# Altium PCB MCU103A.PcbDoc (part 1 of 6)
Units mm, origin at the board's own origin, x right, y up, seen from the top; angles counter-clockwise.
Board outline 58.42 x 139.7 mm, 4 copper layers (Top Signal, GND, PWR, Bottom Signal), stack 1.565 mm thick; 256 components, 210 nets, 1058 pads, 772 vias.
Unrouted connection lines stored in the file: 237.
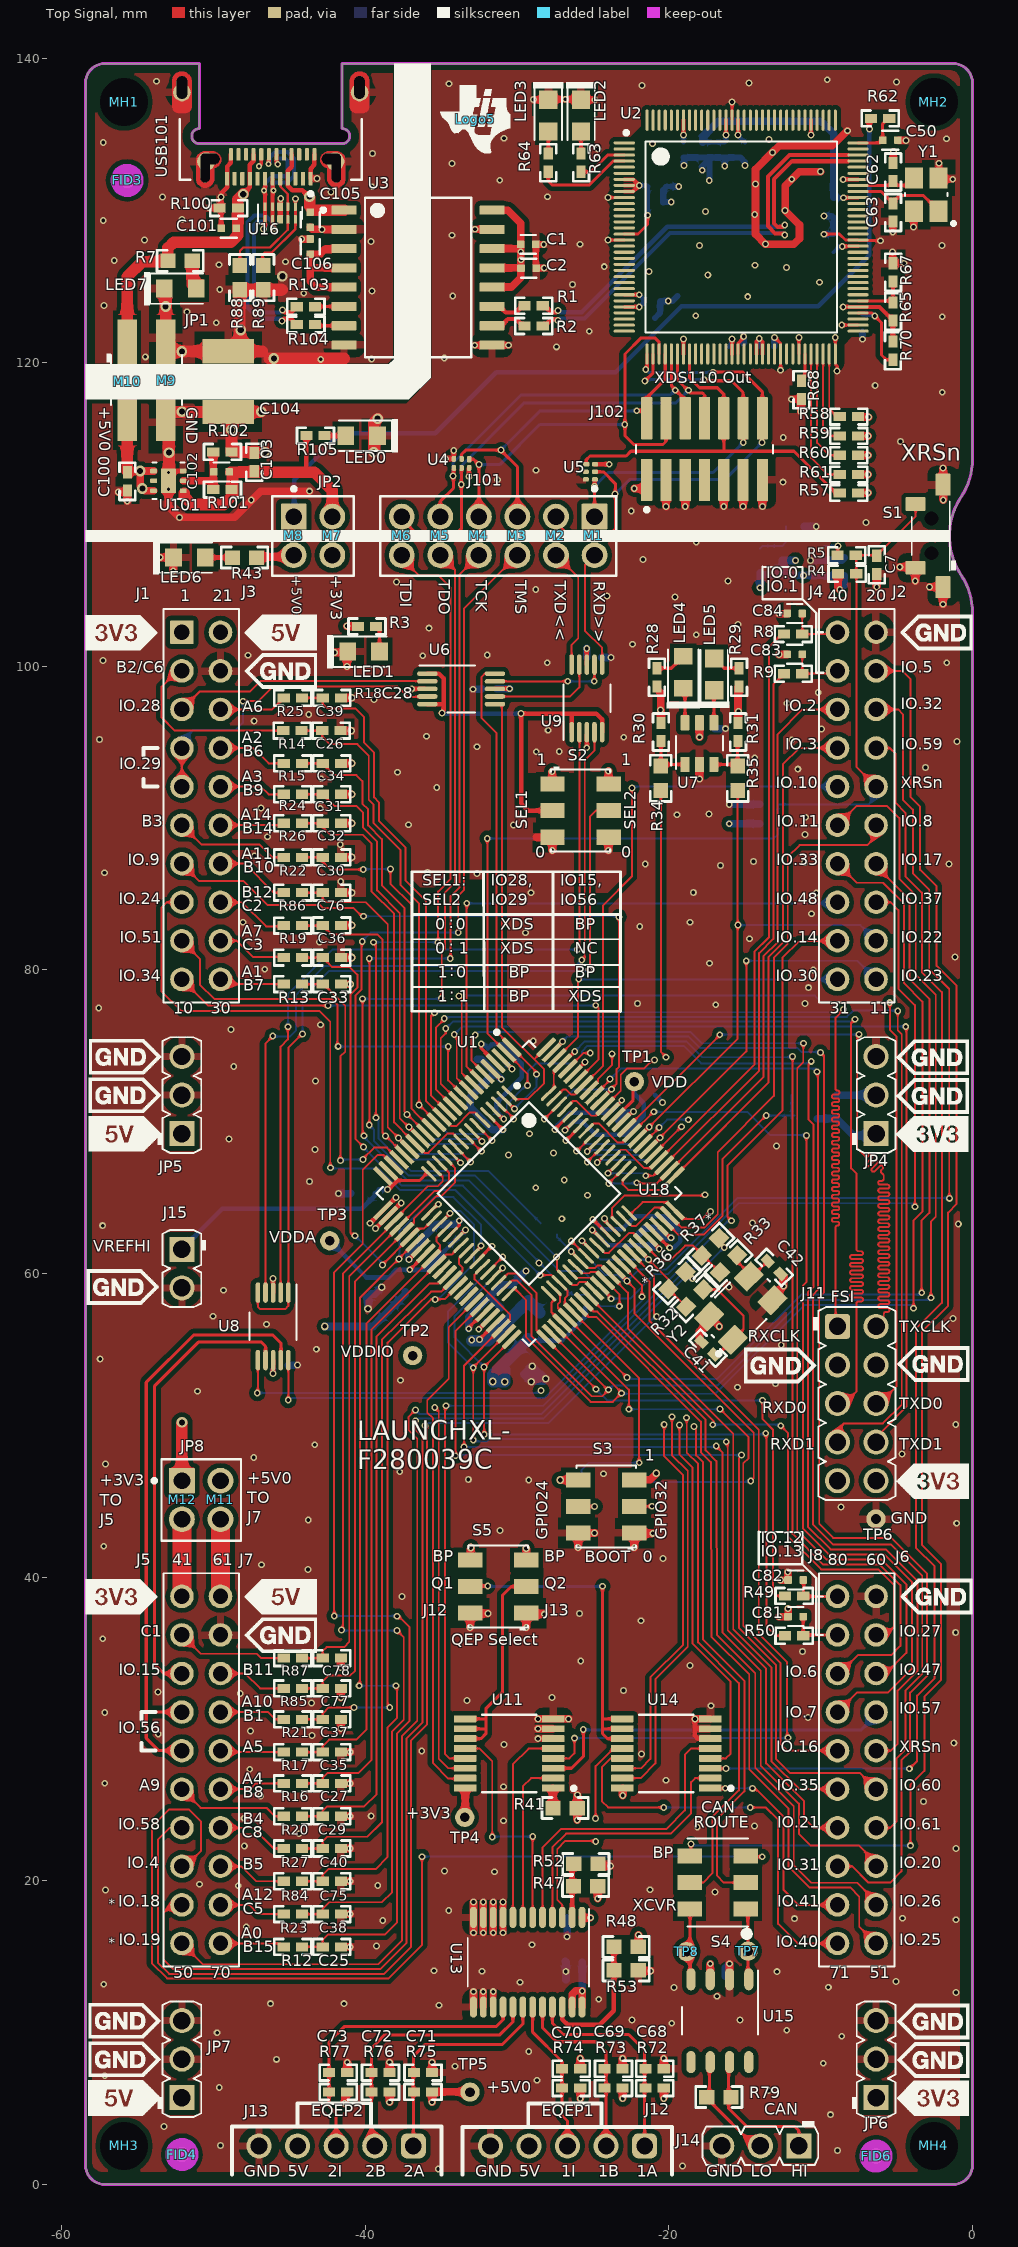
[diagram p0: Top Signal view]
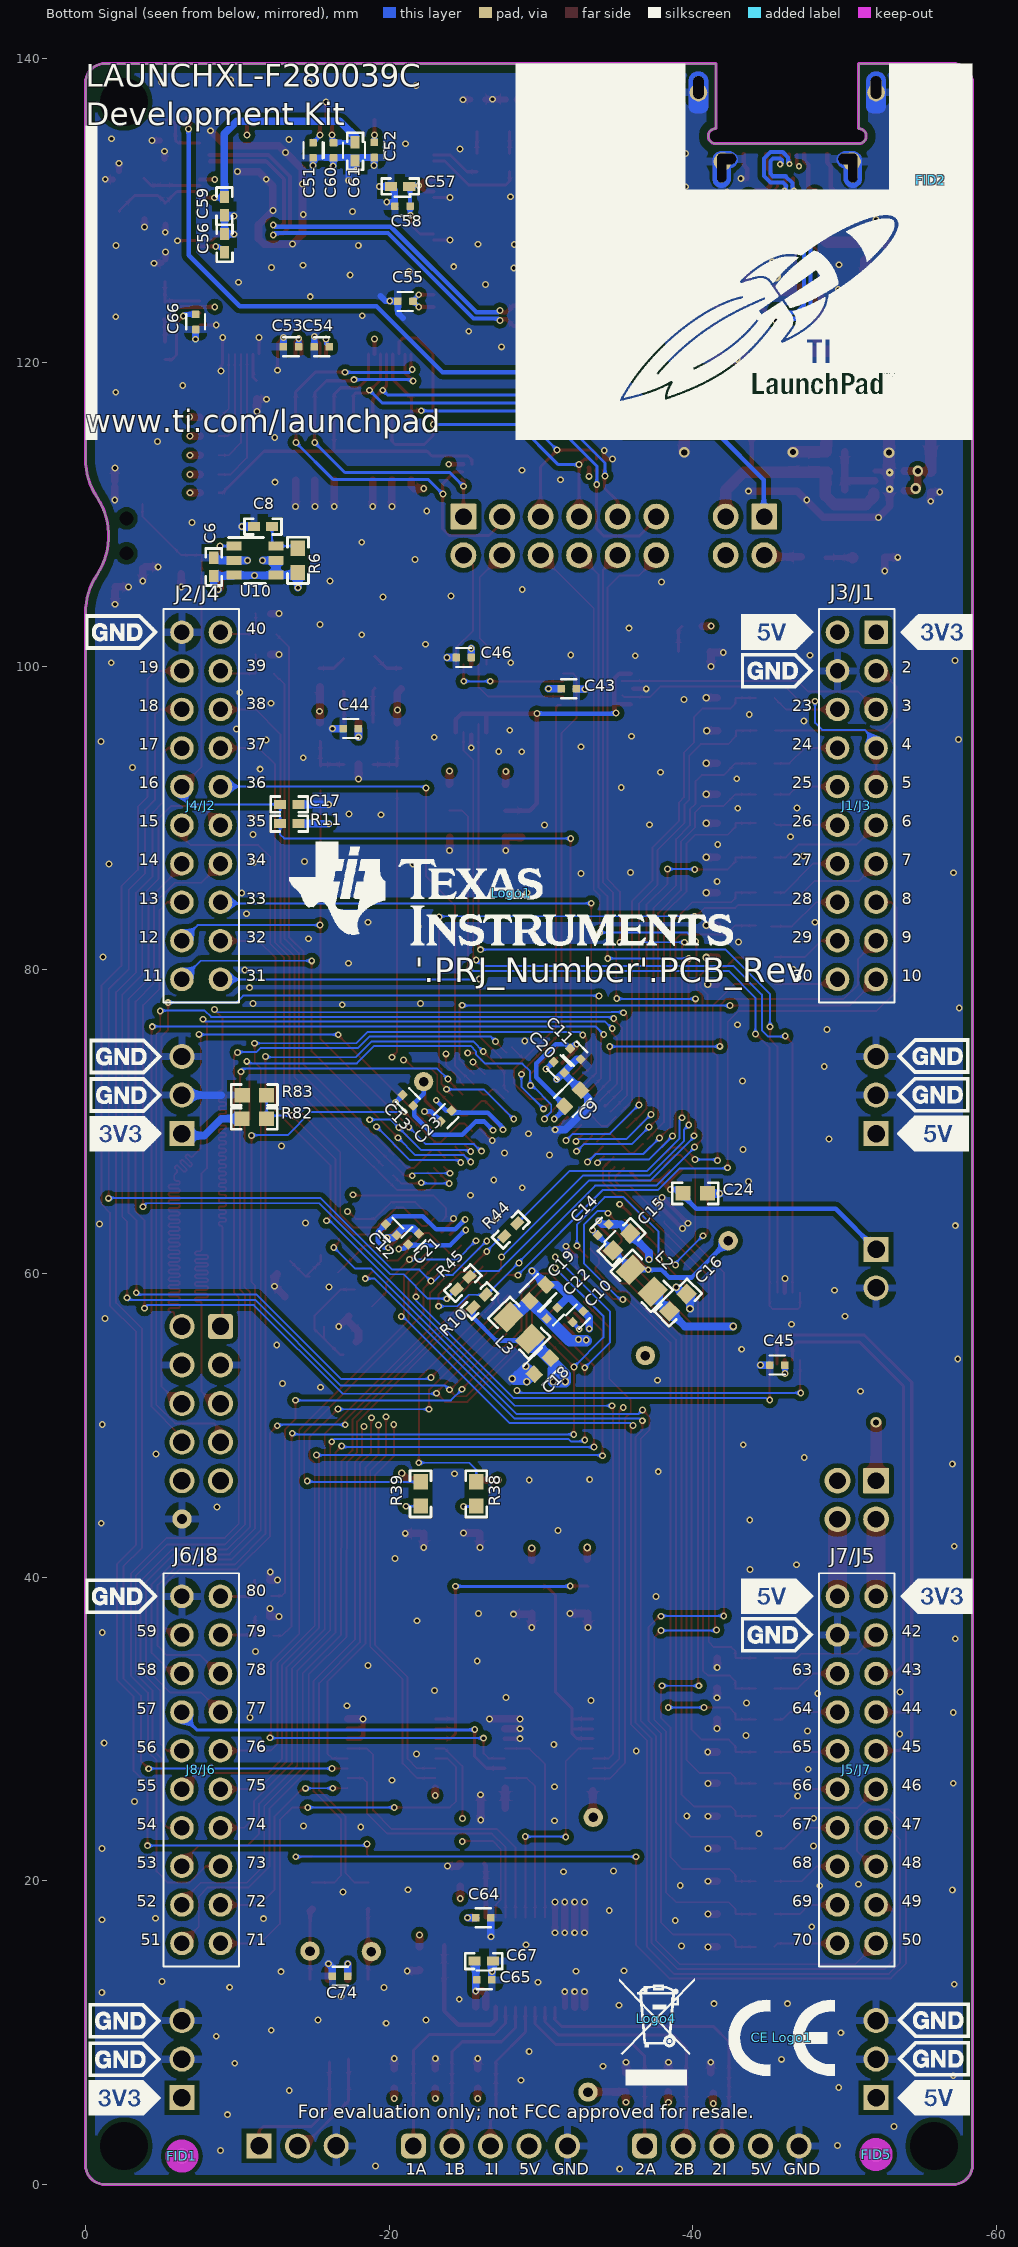
[diagram p1: Bottom Signal view, seen from below]
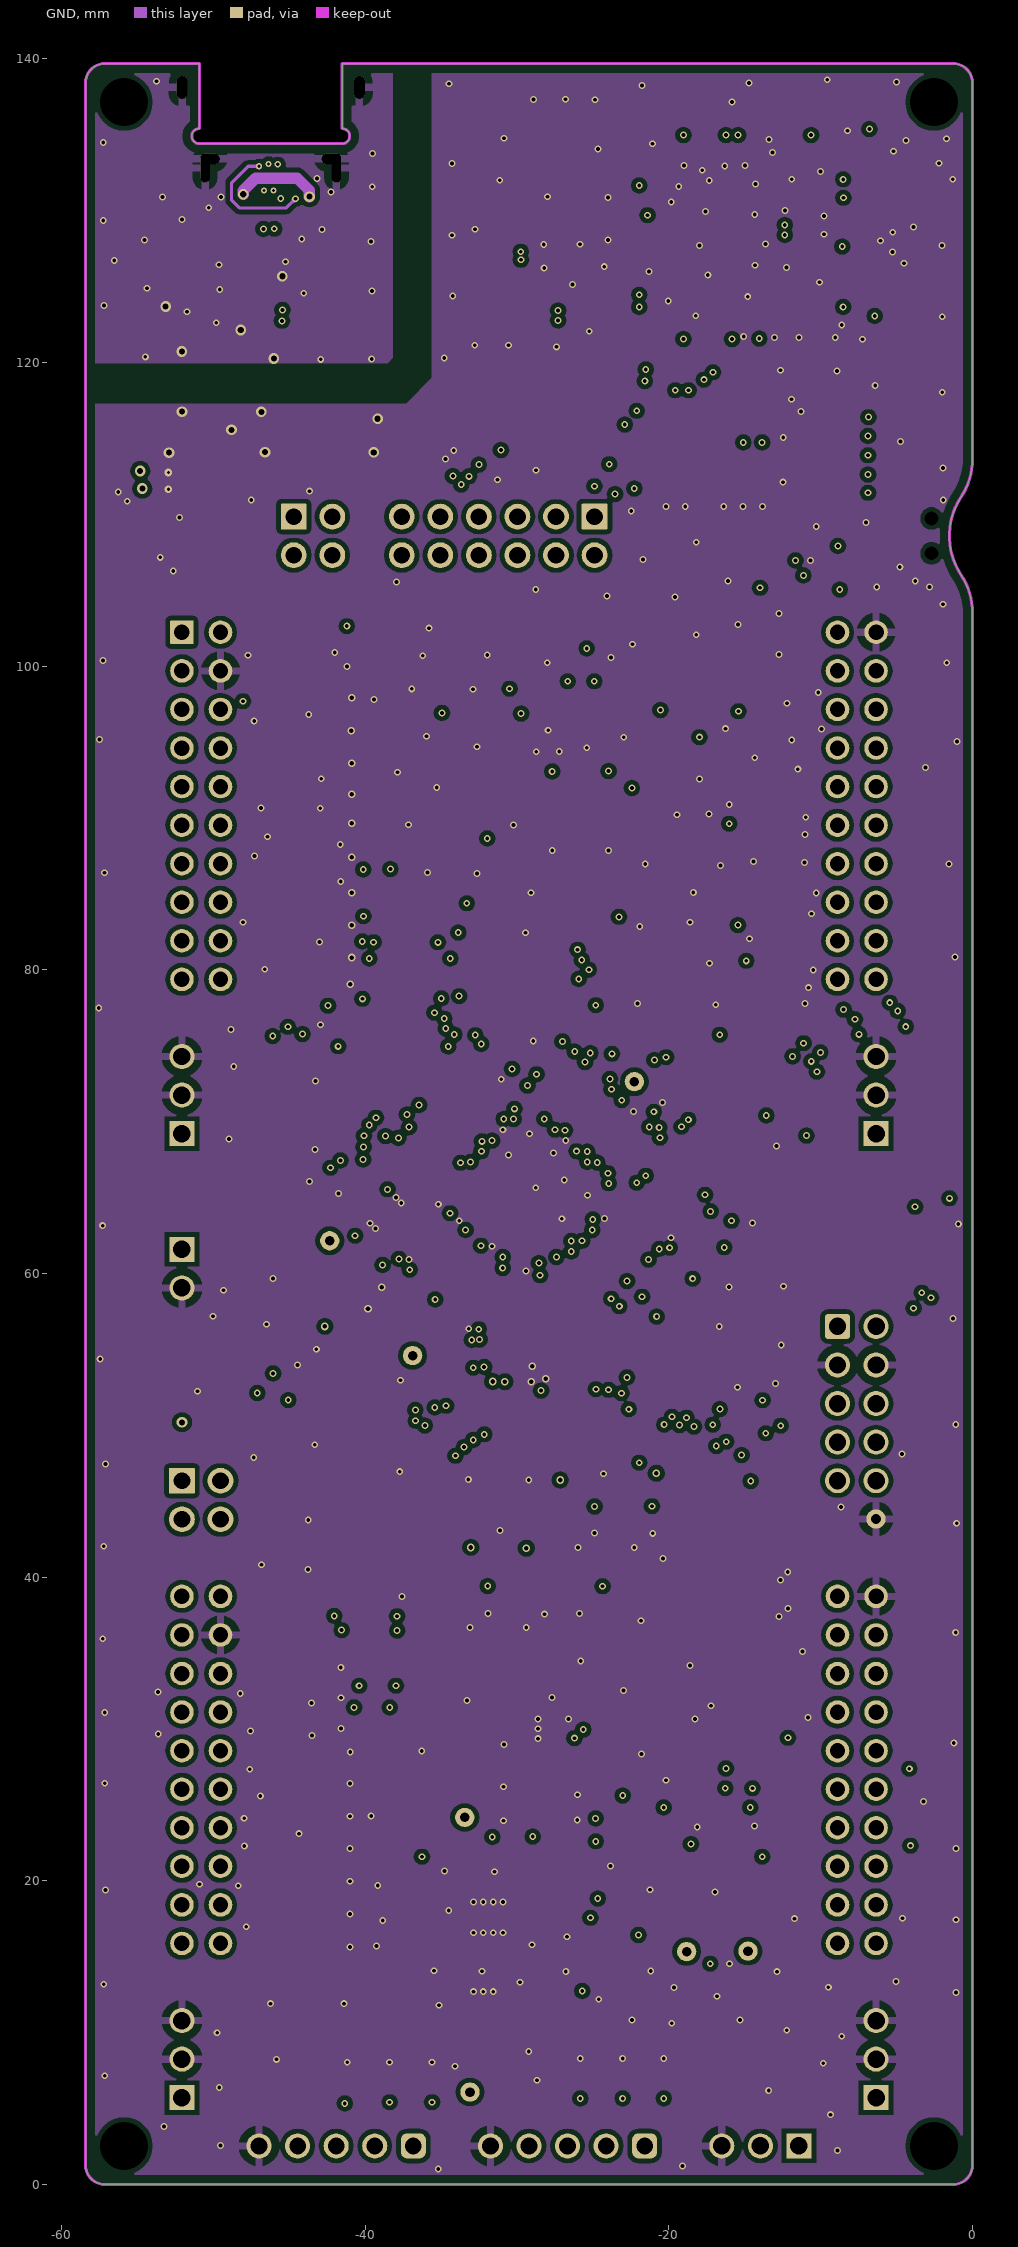
[diagram p2: GND]
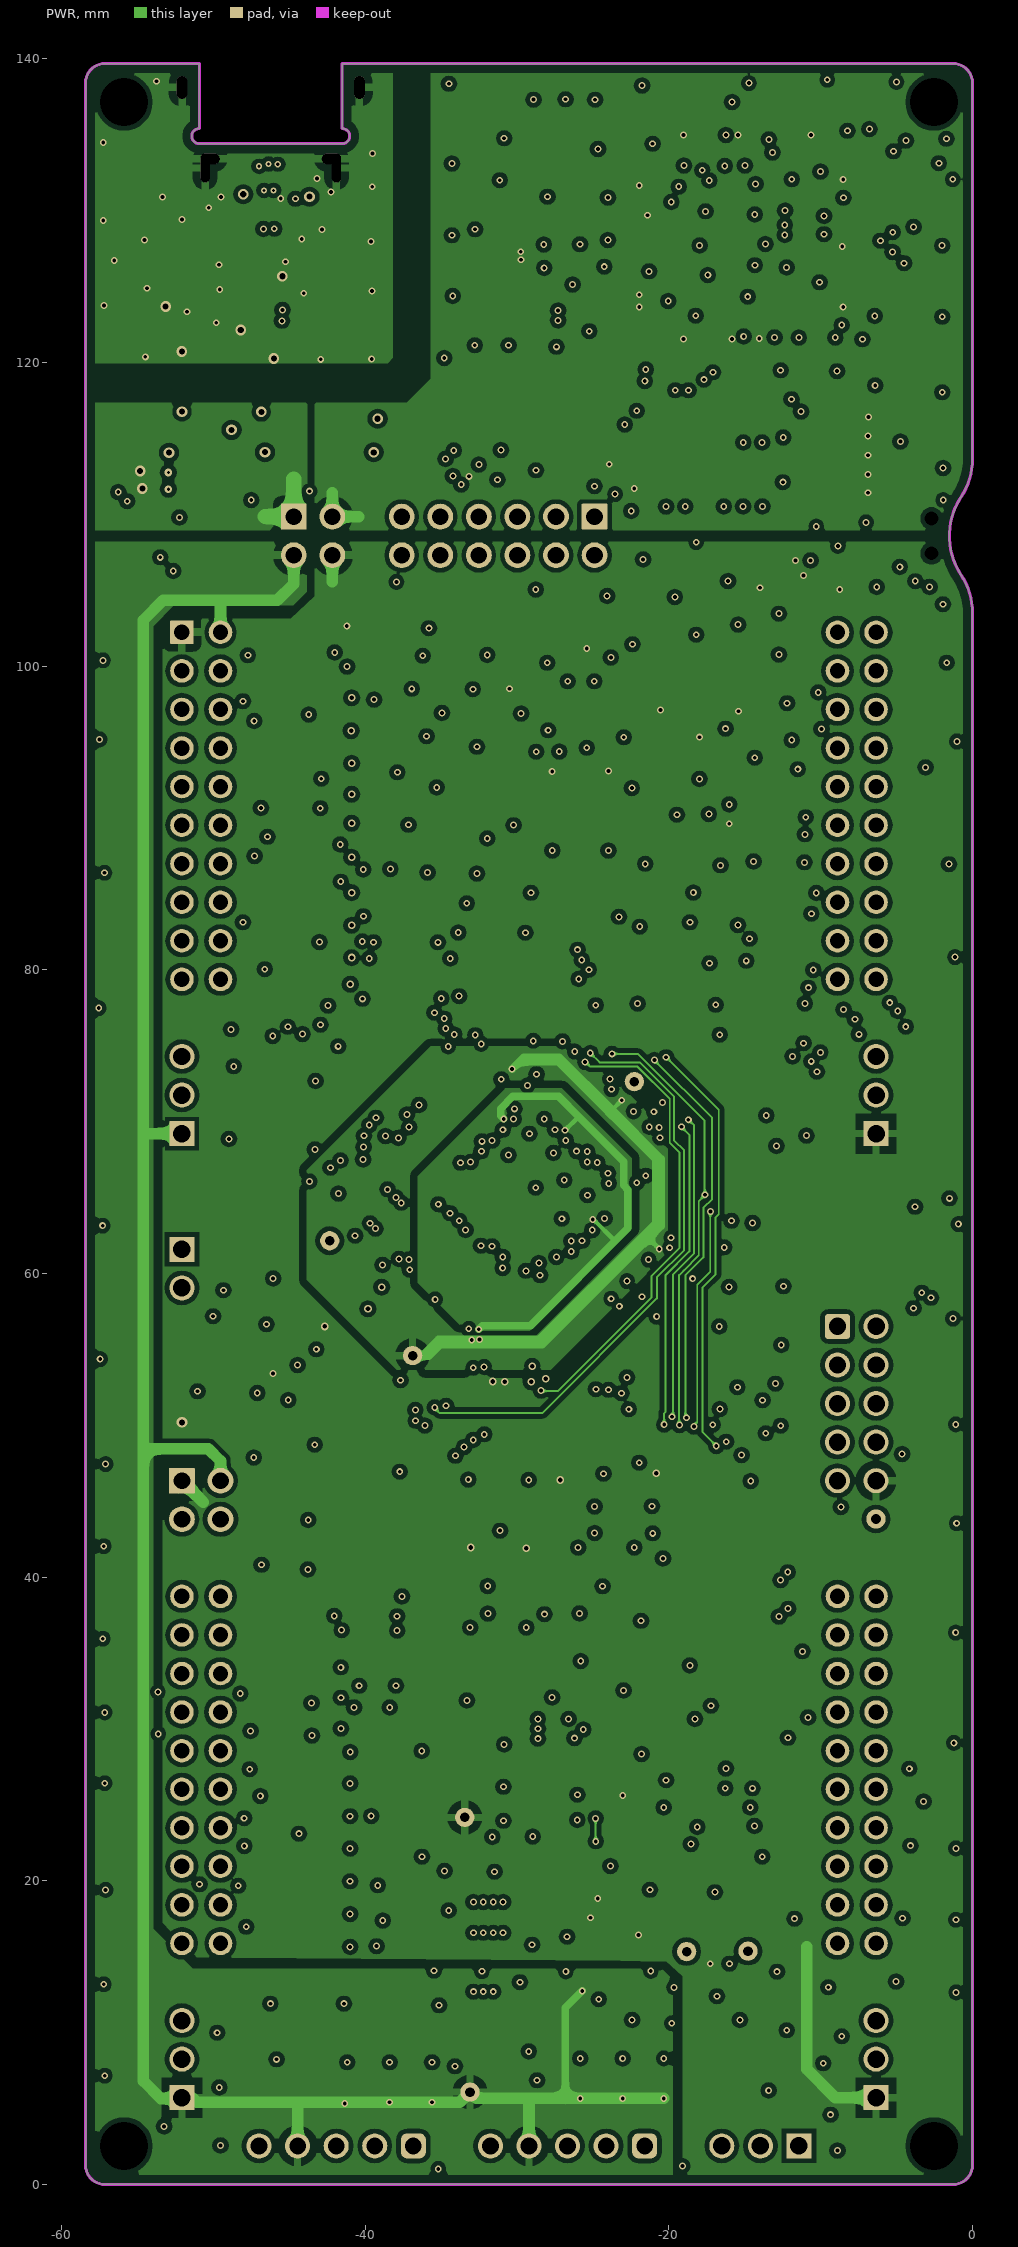
[diagram p3: PWR]
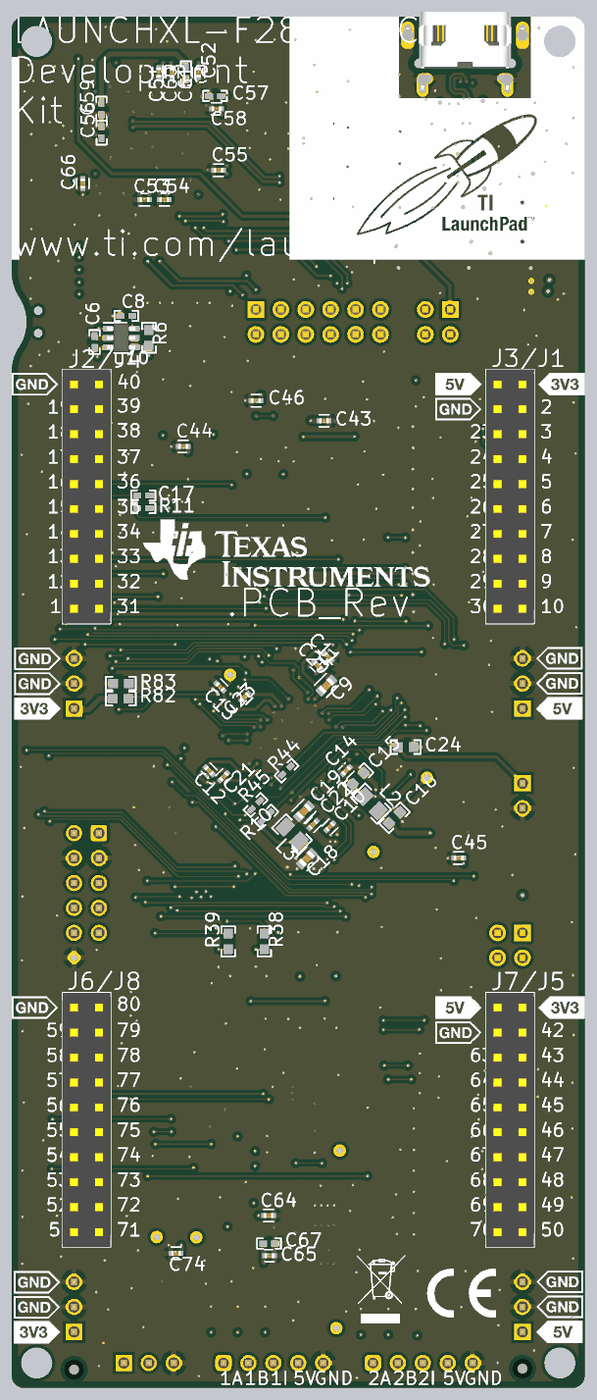
[diagram p8: 3D render of the assembled board from below, using the file's embedded part models]

## Layer stack, top to bottom
Top Solder: solder mask 0.0102, Solder Resist, Dk 3.5
Top Signal: signal copper 0.0356
Dielectric 1: prepreg 0.2032, FR-4, Dk 4.2
GND: signal copper 0.0356
Dielectric 2: core 1.016, FR-4, Dk 4.2
PWR: signal copper 0.0356
Dielectric 3: prepreg 0.2032, FR-4, Dk 4.2
Bottom Signal: signal copper 0.0356
Bottom Solder: solder mask 0.0102, Solder Resist, Dk 3.5

## Board outline
-57.15,0 cw(c-57.15,1.27) -58.42,1.27 -58.42,138.43 cw(c-57.15,138.43) -57.15,139.7 -50.92,139.7 -50.92,135.42 ccw(c-50.92,134.92) -51.42,134.92 ccw(c-50.92,134.92) -50.92,134.42 -41.52,134.42 ccw(c-41.52,134.92) -41.02,134.92 ccw(c-41.52,134.92) -41.52,135.42 -41.52,139.7 -1.27,139.7 cw(c-1.27,138.43) 0,138.43 0,113.665 cw(c-4.614,113.665) -0.762,111.125 ccw(c3.09,108.585) -0.762,106.045 cw(c-4.614,103.505) 0,103.505 0,1.27 cw(c-1.27,1.27) -1.27,0

## Design rules (kind name [scope] priority, off if disabled: settings)
AcuteAngle [All] p1: minimum=4.50000000000000E+0001 checktracksonly=TRUE
AssemblyTestPointUsage [All] p1: valid=2
BoardOutlineClearance BoardOutlineClearance_MountingHoles [OnCopper and InComponentClass('Mounting Holes')] p1: gap=1.016 ignorepadtopadclearanceinfootprint=FALSE
BoardOutlineClearance BoardOutlineClearance_Poly [OnCopper and IsPoly] p2: gap=0.635 ignorepadtopadclearanceinfootprint=FALSE
BoardOutlineClearance BoardOutlineClearance_USB101 [InComponent('USB101')] p3: gap=0 ignorepadtopadclearanceinfootprint=FALSE
BoardOutlineClearance [OnCopper and Not InComponentClass('Logo') and not InComponentClass('FiducialMark') and not InRegion(1000,500,4000,800) and not InPoly] p4: gap=0.254 ignorepadtopadclearanceinfootprint=FALSE
Clearance USB101 [InComponent('USB101') vs OnLayer('Keep-Out Layer')] p1: gap=0.2 ignorepadtopadclearanceinfootprint=FALSE
Clearance Clearance_1 [inpolygon vs inpolygon] p2: gap=0.5 ignorepadtopadclearanceinfootprint=FALSE
Clearance ISVIA [ISVIA vs ISVIA] p3: gap=0.2 ignorepadtopadclearanceinfootprint=FALSE
Clearance Clearance_FiducialMark [InComponentClass('FiducialMark') vs InComponentClass('FiducialMark')] p4: gap=0 ignorepadtopadclearanceinfootprint=FALSE
Clearance Clearance_Boardedge [All vs IsKeepOut] p5: gap=0.3 ignorepadtopadclearanceinfootprint=FALSE
Clearance INPOLYGON [InPolygon] p6: gap=0.3 ignorepadtopadclearanceinfootprint=FALSE
Clearance [All] p7: gap=0.15 ignorepadtopadclearanceinfootprint=FALSE
ComponentClearance "ComponentClearance_overlay to overlay" [OnBottomSilkscreen vs OnTopSilkscreen] p1: gap=0 collisioncheckmode=3 verticalgap=0 showdistances=FALSE
ComponentClearance ComponentClearance_MountingHoles_FiducialMarks [InComponentClass('Mounting Holes') vs InComponentClass('FiducialMark')] p2: gap=1.27 collisioncheckmode=3 verticalgap=0.254 showdistances=FALSE
ComponentClearance ComponentClearance_Shunt [InComponentClass('Header') vs InComponentClass('Shunt')] p3: gap=0 collisioncheckmode=3 verticalgap=0 showdistances=FALSE
ComponentClearance ComponentClearance_Logo [InComponentClass('Logo')] p4: gap=0 collisioncheckmode=3 verticalgap=0 showdistances=FALSE
ComponentClearance ComponentClearance_Logo_1 [InComponentClass('Logo') vs InComponentClass('Logo')] p5: gap=0 collisioncheckmode=3 verticalgap=0 showdistances=FALSE
ComponentClearance ComponentClearance_ScrewToNut [(HasFootprint('NY PMS 440 0025 PH')) vs (HasFootprint('Keystone_1902C'))] p6: gap=0.1 collisioncheckmode=3 verticalgap=0.1 showdistances=FALSE
ComponentClearance ComponentClearance_MountingHoles [InComponentClass('Mounting Holes')] p7 off: gap=6.35 collisioncheckmode=3 verticalgap=2540 showdistances=FALSE
ComponentClearance ComponentClearance_SmallPassives [HasFootprint('0201*') or HasFootprint('0402*') or HasFootprint('0508') or HasFootprint('0603*') or HasFootprint('0612') or HasFootprint('0805*') or HasFootprint('0815*') or HasFootprint('0830*') or HasFootprint('1206*') or HasFootprint('1210*') or HasFootprint('1808*') or HasFootprint('1812*') or HasFootprint('1825*') or HasFootprint('2010*') or HasFootprint('2220*') or HasFootprint('2225*') or HasFootprint('2512*') or HasFootprint('2728*') or HasFootprint('3518*') vs HasFootprint('0201*') or HasFootprint('0402*') or HasFootprint('0508') or HasFootprint('0603*') or HasFootprint('0612') or HasFootprint('0805*') or HasFootprint('0815*') or HasFootprint('0830*') or HasFootprint('1206*') or HasFootprint('1210*') or HasFootprint('1808*') or HasFootprint('1812*') or HasFootprint('1825*') or HasFootprint('2010*') or HasFootprint('2220*') or HasFootprint('2225*') or HasFootprint('2512*') or HasFootprint('2728*') or HasFootprint('3518*')] p8 off: gap=0.254 collisioncheckmode=3 verticalgap=0 showdistances=FALSE
ComponentClearance ComponentClearance_THtoSMT [IsThruComponent vs IsSMTComponent] p9 off: gap=0.254 collisioncheckmode=3 verticalgap=0.254 showdistances=FALSE
ComponentClearance ComponentClearance_THtoTH [IsThruComponent vs IsThruComponent] p10 off: gap=0.508 collisioncheckmode=3 verticalgap=0.762 showdistances=FALSE
DiffPairsRouting [All] p1: maxlimit=2.54 minlimit=0.127 mostfreqgap=0.15 toplayer_minwidth=0.15 toplayer_maxwidth=0.381 toplayer_prefwidth=0.27 midlayer1_minwidth=0.15 midlayer1_maxwidth=0.381 midlayer1_prefwidth=0.27 midlayer2_minwidth=0.15 midlayer2_maxwidth=0.381 midlayer2_prefwidth=0.27 bottomlayer_minwidth=0.15 bottomlayer_maxwidth=0.381 bottomlayer_prefwidth=0.27 maxuncoupledlength=25.4
FabricationTestPointUsage TestPointUsage [All] p1: valid=2 allowmultiple=FALSE
FabricationTestpoint Testpoint [All] p1: side=3 testpointundercomponent=TRUE minsize=1.016 maxsize=2.54 preferedsize=1.524 minholesize=0 maxholesize=1.016 preferedholesize=0.813 testpointgrid=0.025 allowsidetop=TRUE allowsidebottom=TRUE usegrid=TRUE gridtolerance=0
FanoutControl Fanout_LCC [IsLCC] p1: bgadir=Out bgaviamode=Centered fanoutstyle=Auto fanoutdirection=Alternating viagrid=0.025 // Fanout_LCC (Default Rule)
FanoutControl Fanout_BGA [IsBGA] p2: bgadir=Out bgaviamode=Centered fanoutstyle=Auto fanoutdirection=Alternating viagrid=0.025 // Fanout_BGA (Default Rule)
FanoutControl Fanout_Default [All] p4: bgadir=Out bgaviamode=Centered fanoutstyle=Auto fanoutdirection=Alternating viagrid=0.025 // Fanout_Default (Default Rule)
FanoutControl Fanout_Small [(CompPinCount < 5)] p5: bgadir=Out bgaviamode=Centered fanoutstyle=Auto fanoutdirection=OutThenIn viagrid=0.025 // Fanout_Small (Default Rule)
HoleSize [All] p1: absolutevalues=TRUE maxlimit=6.375 minlimit=0.2 maxpercent=80.000 minpercent=20.000
HoleToHoleClearance HoleToHoleClearance_USB101 [InComponent('USB101') vs InComponent('USB101')] p1: gap=0 allowstackedmicrovias=TRUE
HoleToHoleClearance [All] p2: gap=0.25 allowstackedmicrovias=TRUE
MatchedLengths FSIRX [InNetClass('FSIRX')] p1: tolerance=0.635 checknetsindiffpair=FALSE checkdiffpairvsdiffpair=TRUE checkxsignals=TRUE checkothers=TRUE
MatchedLengths FSITX [InNetClass('FSITX')] p2: tolerance=0.635 checknetsindiffpair=FALSE checkdiffpairvsdiffpair=TRUE checkxsignals=TRUE checkothers=TRUE
MinimumAnnularRing MinimumAnnularRing_ThermalPadVias [IsVia and InAnyComponent] p1: minimumring=0.1
MinimumAnnularRing [All] p2: minimumring=0.1
MinimumSolderMaskSliver MinimumSolderMaskSliver_Logo [InComponentClass('Logo') vs InComponentClass('Logo')] p1: minsoldermaskwidth=0.018
MinimumSolderMaskSliver [All] p2: minsoldermaskwidth=0.076
PlaneClearance [All] p1: clearance=0.127
PlaneConnect [All] p1: planeconnectstyle=Relief reliefexpansion=0.254 reliefentries=4 reliefconductorwidth=0.635 reliefairgap=0.254
PolygonConnect PolygonConnect_via [isvia] p1: connectstyle=Direct reliefconductorwidth=0.254 reliefentries=4 polygonreliefangle="90 Angle" airgapwidth=0.127
PolygonConnect [All] p2: connectstyle=Relief reliefconductorwidth=0.508 reliefentries=4 polygonreliefangle="90 Angle" airgapwidth=0.5
RoutingVias ThermalPadVias [IsVia and InAnyComponent] p1: holewidth=0.2 width=0.5 viastyle="Through Hole" minholewidth=0.2 minwidth=0.5 maxholewidth=0.33 maxwidth=0.6
RoutingVias [All] p2: holewidth=0.25 width=0.45 viastyle="Through Hole" minholewidth=0.2 minwidth=0.4 maxholewidth=1.016 maxwidth=1.651
SilkToBoardRegionClearance [Not ((IsComment or IsDesignator) And (Hide <> 'False')) and not InRegion(1000,500,4000,800)] p1:
SilkToSilkClearance SilkToSilkClearance_Pb-FreeLogo [(HasFootprint('Pb-Free_Overlay_Medium') OR HasFootprint('Pb-Free_Overlay_Small')) vs (HasFootprint('Pb-Free_Overlay_Medium') OR HasFootprint('Pb-Free_Overlay_Small'))] p1: silktosilkclearance=0
SilkToSilkClearance [All] p2: silktosilkclearance=0.076
SilkToSolderMaskClearance SilkToComponentPadClearance [(IsPad or IsFill or IsRegion) and InAnycomponent] p1: minsilkscreentomaskgap=0.076 clearancetoexposedcopper=TRUE
SilkToSolderMaskClearance "Silk to Solder Mask Opening" [All] p2: minsilkscreentomaskgap=0.076 clearancetoexposedcopper=TRUE
SolderMaskExpansion [All] p1: expansion=0.051 istentingtop=FALSE
Width Analog [InNetClass('Analog')] p1: maxlimit=0.635 minlimit=0.203 preferedwidth=0.203
Width [All] p2: maxlimit=2.54 minlimit=0.127 preferedwidth=0.127 checkconnectedcopper=TRUE
13 further rules are at their usual default settings.

## Classes and differential pairs
net class FSITX: GPIO44_FSITXCLK GPIO49_FSITXD0 GPIO50_FSITXD1
net class FSIRX: GPIO52_FSIRXD0 GPIO53_FSIRXD1 GPIO54_FSIRXCLK
component class MCU103A_F2800137_Device: U18
component class MCU103A_USB_and_Power: C1 C2 C6 C7 C8 C100 C101 C102 C103 C104 C105 C106 JP1 JP2 JP4 JP5 JP6 JP7 JP10 LED0 LED1 LED6 LED7 R1 R2 R3 R4 R5 R6 R7 R43 R88 R89 R100 R101 R102 R103 R104 R105 TP1 TP2 TP3 TP4 TP5 TP6 U3 U10 U16 U101 USB101
component class MCU103A_XDS110_MCU: C50 C51 C52 C53 C54 C55 C56 C57 C58 C59 C60 C61 C62 C63 C66 J101 J102 LED2 LED3 R57 R58 R59 R60 R61 R62 R63 R64 R65 R67 R68 R70 R? U2 U4 U5 Y1
component class MCU103A_F280039C_Device: C9 C10 C11 C12 C13 C14 C15 C16 C17 C18 C19 C20 C21 C22 C23 C24 C25 C26 C27 C28 C29 C30 C31 C32 C33 C34 C35 C36 C37 C38 C39 C40 C75 C76 C77 C78 J15 L2 L3 R10 R11 R12 R13 R14 R15 R16 R17 R18 R19 R20 R21 R22 R23 R24 R25 R26 R27 R44 R45 R82 R83 R84 R85 R86 R87 S1 U1
component class MCU103A_Connectors: C68 C69 C70 C71 C72 C73 C74 C81 C82 C83 C84 J1/J3 J4/J2 J5/J7 J8/J6 J11 J12 J13 J14 JP8 R8 R9 R49 R50 R72 R73 R74 R75 R76 R77 R79 TP7 TP8 U15
component class MCU103A_AltRouting_Misc: C41 C42 C43 C44 C45 C46 C64 C65 C67 LED4 LED5 R28 R29 R30 R31 R32 R33 R34 R35 R36 R37 R38 R39 R41 R47 R48 R52 R53 S2 S3 S4 S5 U6 U7 U8 U9 U11 U13 U14 Y2
component class Header: J11 J12 J13 J14 J15 JP1 JP4 JP5 JP6 JP7 JP10
component class AssemblyNote: ZZ1 ZZ2 ZZ3
component class FiducialMark: FID1 FID2 FID3 FID4 FID5 FID6
component class MCU103A_Hardware: "CE Logo1" FID1 FID2 FID3 FID4 FID5 FID6 Logo1 Logo3 Logo4 Logo5 M1 M2 M3 M4 M5 M6 M7 M8 M9 M10 M11 M12 MH1 MH2 MH3 MH4 ZZ1 ZZ2 ZZ3
component class Logo: Logo1 Logo5
component class Shunt: M1 M2 M3 M4 M5 M6 M7 M8 M9 M10 M11 M12

## Components (designator, comment, footprint, x,y, rotation, side; value= is the part's Value field where it differs from the comment)
C1 "885012205018" FP-885012205018_0402-MFG -29.261,127.787 r180 top value=100nF
C2 "885012205018" FP-885012205018_0402-MFG -29.235,126.222 r180 top value=100nF
C6 "GRM155R71A104KA01D" 0402 -8.446,106.544 r270 bottom value=0.1uF
C7 "GRM155R71E103KA01D" 0402 -6.305,106.681 r270 top value=0.01uF
C8 "GRM155R71E103KA01D" 0402 -11.689,109.204 r0 bottom value=0.01uF
C9 "CC0603KRX5R6BB106" FP-CC0603KRX5R6BB106_0603-MFG -32.078,71.552 r315 bottom value=10µF
C10 "885012205018" FP-885012205018_0402-MFG -32.439,57.16 r315 bottom value=100nF
C11 "885012205018" FP-885012205018_0402-MFG -32.267,74.469 r45 bottom value=100nF
C12 "885012205018" FP-885012205018_0402-MFG -20.135,62.878 r45 bottom value=100nF
C13 "885012205018" FP-885012205018_0402-MFG -21.234,71.409 r225 bottom value=100nF
C14 "885012205018" FP-885012205018_0402-MFG -34.094,62.886 r315 bottom value=100nF
C15 "GRM188R61A225KE34D" 0603 -35.31,62.077 r135 bottom value=2.2uF
C16 "GRM188R61A225KE34D" 0603 -39.032,58.086 r135 bottom value=2.2uF
C17 "GRM155R71A104KA01D" 0402 -13.418,90.902 r0 bottom value=0.1uF
C18 "CC0603KRX5R6BB106" FP-CC0603KRX5R6BB106_0603-MFG -30.086,53.902 r135 bottom value=10µF
C19 "CC0603KRX5R6BB106" FP-CC0603KRX5R6BB106_0603-MFG -29.797,58.728 r315 bottom value=10µF
C20 "885012205018" FP-885012205018_0402-MFG -31.194,73.583 r45 bottom value=100nF
C21 "885012205018" FP-885012205018_0402-MFG -21.604,62.273 r315 bottom value=100nF
C22 "885012205018" FP-885012205018_0402-MFG -30.726,57.39 r315 bottom value=100nF
C23 "885012205018" FP-885012205018_0402-MFG -23.752,70.374 r135 bottom value=100nF
C24 "GRM188R61A225KE34D" 0603 -40.16,65.278 r180 bottom value=2.2uF
C25 "885012005063" 0402 -42.199,15.649 r0 top value=220pF
C26 "885012005063" 0402 -42.199,93.599 r0 top value=220pF
C27 "885012005063" 0402 -42.199,26.416 r0 top value=220pF
C28 "885012005063" 0402 -42.199,97.917 r0 top value=220pF
C29 "885012005063" 0402 -42.199,24.257 r0 top value=220pF
C30 "885012005063" 0402 -42.199,85.09 r0 top value=220pF
C31 "885012005063" 0402 -42.199,89.662 r0 top value=220pF
C32 "885012005063" 0402 -42.199,87.411 r0 top value=220pF
C33 "885012005063" 0402 -42.199,79.061 r0 top value=220pF
C34 "885012005063" 0402 -42.199,91.567 r0 top value=220pF
C35 "885012005063" 0402 -42.199,28.479 r0 top value=220pF
C36 "885012005063" 0402 -42.199,80.814 r0 top value=220pF
C37 "885012005063" 0402 -42.199,30.638 r0 top value=220pF
C38 "885012005063" 0402 -42.199,17.811 r0 top value=220pF
C39 "885012005063" 0402 -42.232,95.758 r0 top value=220pF
C40 "885012005063" 0402 -42.199,22.129 r0 top value=220pF
C41 "C0402C120J3GACAUTO" 0402 -17.421,55.084 r135 top value=12pF
C42 "C0402C120J3GACAUTO" 0402 -13.058,60.404 r315 top value=12pF
C43 "885012205018" FP-885012205018_0402-MFG -31.835,98.521 r180 bottom value=100nF
C44 "885012205018" FP-885012205018_0402-MFG -17.475,95.897 r180 bottom value=100nF
C45 "885012205018" FP-885012205018_0402-MFG -45.567,53.971 r0 bottom value=100nF
C46 "885012205018" FP-885012205018_0402-MFG -24.906,100.577 r180 bottom value=100nF
C50 "885012205050" FP-885012205050_0402-MFG -5.413,134.651 r180 top value=10nF
C51 "885012205050" FP-885012205050_0402-MFG -14.986,133.985 r90 bottom value=10nF
C52 "885012205050" FP-885012205050_0402-MFG -19.03,134.008 r90 bottom value=10nF
C53 "885012205050" FP-885012205050_0402-MFG -13.531,121.038 r180 bottom value=10nF
C54 "885012205018" FP-885012205018_0402-MFG -15.561,121.038 r180 bottom value=100nF
C55 "885012205018" FP-885012205018_0402-MFG -21.071,124.031 r180 bottom value=100nF
C56 "885012105012" 0402 -9.164,127.867 r90 bottom value=1uF
C57 "885012105012" 0402 -20.727,131.608 r0 bottom value=1uF
C58 "885012205050" FP-885012205050_0402-MFG -20.879,130.302 r180 bottom value=10nF
C59 "885012105012" 0402 -9.143,130.309 r270 bottom value=1uF
C60 "885012205018" FP-885012205018_0402-MFG -16.336,133.983 r90 bottom value=100nF
C61 "885012105012" 0402 -17.759,133.919 r270 bottom value=1uF
C62 "GRM1555C1H120JA01D" 0402 -5.232,132.553 r90 top value=12pF
C63 "GRM1555C1H120JA01D" 0402 -5.232,129.886 r270 top value=12pF
C64 "885012205018" FP-885012205018_0402-MFG -26.199,17.564 r180 bottom value=100nF
C65 "885012205018" FP-885012205018_0402-MFG -26.27,13.475 r0 bottom value=100nF
C66 "885012205018" FP-885012205018_0402-MFG -7.251,122.683 r90 bottom value=100nF
C67 "885012205061" 0402 -26.228,14.711 r180 bottom value=1000pF
C68 "885012205061" 0402 -20.93,7.62 r0 top value=1000pF
C69 "885012205061" 0402 -23.641,7.62 r0 top value=1000pF
C70 "885012205061" 0402 -26.435,7.62 r0 top value=1000pF
C71 "885012205061" 0402 -36.195,7.366 r0 top value=1000pF
C72 "885012205061" 0402 -38.989,7.366 r0 top value=1000pF
C73 "885012205061" 0402 -41.783,7.366 r0 top value=1000pF
C74 "885012205018" FP-885012205018_0402-MFG -16.764,13.724 r0 bottom value=100nF
C75 "885012005063" 0402 -42.199,19.97 r0 top value=220pF
C76 "885012005063" 0402 -42.199,82.93 r0 top value=220pF
C77 "885012005063" 0402 -42.199,32.67 r0 top value=220pF
C78 "885012005063" 0402 -42.199,34.671 r0 top value=220pF
C81 "885012205018" FP-885012205018_0402-MFG -11.648,37.405 r0 top value=100nF
C82 "885012205018" FP-885012205018_0402-MFG -11.648,39.814 r0 top value=100nF
C83 "885012205018" FP-885012205018_0402-MFG -11.709,100.784 r0 top value=100nF
C84 "885012205018" FP-885012205018_0402-MFG -11.709,103.478 r0 top value=100nF
C100 "885012105012" 0402 -55.658,112.176 r270 top value=1uF
C101 "885012205064" FP-885012205064_0402-MFG -48.989,128.849 r0 top value=3.3nF
C102 "885012205050" FP-885012205050_0402-MFG -49.462,112.8 r0 top value=10nF
C103 "885012105012" 0402 -47.31,113.446 r90 top value=1uF
C104 "1812SC103KAT1A" 1812 -49.022,118.745 r90 top value=0.01uF
C105 "885012205018" FP-885012205018_0402-MFG -43.626,129.413 r90 top value=100nF
C106 "885012205018" FP-885012205018_0402-MFG -43.626,127.643 r270 top value=100nF
"CE Logo1" "CE Mark" CE_Mark_5mm -45.847,9.652 r180 bottom
FID1 "Fiducial" Fiducial10-20 -6.35,1.872 r180 bottom
FID2 "Fiducial" Fiducial10-20 -55.68,132.001 r180 bottom
FID3 "Fiducial" Fiducial10-20 -55.68,132.001 r0 top
FID4 "Fiducial" Fiducial10-20 -52.07,1.973 r0 top
FID5 "Fiducial" Fiducial10-20 -52.07,1.973 r180 bottom
FID6 "Fiducial" Fiducial10-20 -6.35,1.872 r0 top
J1/J3 "SSQ-110-03-T-D" BoosterPack_40pin_J1J3 -50.8,90.805 r180 bottom locked
J4/J2 "SSQ-110-03-T-D" BoosterPack_40pin_J2J4 -7.62,90.805 r180 bottom locked
J5/J7 "SSQ-110-03-T-D" BoosterPack_40pin_J5J7 -50.8,27.305 r180 bottom locked
J8/J6 "SSQ-110-03-T-D" BoosterPack_40pin_J6J8 -7.62,27.305 r180 bottom locked
J11 "61301021121" WURTH_61301021121 -7.62,51.435 r270 top locked
J12 "61300511121" Wurth_61300511121 -26.67,2.54 r180 top locked
J13 "61300511121" Wurth_61300511121 -41.91,2.54 r180 top locked
J14 "61300311121" WURTH_61300311121 -13.97,2.54 r180 top locked
J15 "61300211121" WURTH_61300211121 -52.07,60.325 r270 top locked
J101 "61301221121" FP-61301221121_HDR12-MFG -31.242,108.585 r180 top locked
J102 "FTSH-107-01-F-DV-K" FP-FTSH-107-01-F-DV-K_HDR14-MFG -17.648,114.3 r0 top
JP1 "TSM-102-01-L-DV" Samtec_TSM-102-01-x-DV -54.406,118.847 r270 top locked
JP2 "61300421121" FP-61300421121_HDR4-MFG#1 -43.434,108.585 r0 top
JP4 "61300311121" WURTH_61300311121 -6.35,71.755 r90 top
JP5 "61300311121" WURTH_61300311121 -52.07,71.755 r90 top locked
JP6 "61300311121" WURTH_61300311121 -6.35,8.255 r90 top locked
JP7 "61300311121" WURTH_61300311121 -52.07,8.255 r90 top locked
JP8 "61300421121" FP-61300421121_HDR4-MFG#2 -50.8,45.085 r270 top locked
L2 "742792063" 0805_HV -36.64,59.526 r45 bottom value="60 ohm"
L3 "742792022" 0805_HV -28.571,56.42 r45 bottom value="220 ohm"
LED0 "150080SS75000" WL-SMCW_RED_0805 -40.234,115.189 r180 top value=Red
LED1 "150080SS75000" WL-SMCW_RED_0805 -40.106,100.965 r0 top value=Red
LED2 "LTST-C170TBKT" LTST-C170TBKT_Blue -25.781,136.271 r90 top value=Blue
LED3 "LTST-C170TBKT" LTST-C170TBKT_Blue -27.94,136.271 r90 top value=Blue
LED4 "150080SS75000" WL-SMCW_RED_0805 -19.05,99.602 r90 top value=Red
LED5 "LTST-C171GKT" LED_LTST-C171 -17.002,99.464 r270 top value=Green
LED6 "150080SS75000" WL-SMCW_RED_0805 -51.575,107.157 r0 top value=Red
LED7 "150080SS75000" WL-SMCW_RED_0805 -52.184,124.876 r0 top value=Red
Logo1 "Texas Instruments" TI_Stacked_Overlay_Medium -28.025,85.039 r180 bottom
Logo3 "FCC disclaimer" FCC_disclaimer 25.273,4.064 r180 bottom
Logo4 "WEEE logo" WEEE_Minimum -37.592,10.922 r180 bottom
Logo5 "Texas Instruments" TI_Symbol_Overlay_Small -32.745,136.017 r0 top
M1 "60900213421" Wurth_60900213421 -24.947,108.585 r270 top
M2 "60900213421" Wurth_60900213421 -27.441,108.585 r90 top
M3 "60900213421" Wurth_60900213421 -29.972,108.585 r90 top
M4 "60900213421" Wurth_60900213421 -32.512,108.585 r90 top
M5 "60900213421" Wurth_60900213421 -35.052,108.585 r90 top
M6 "60900213421" Wurth_60900213421 -37.592,108.585 r90 top
M7 "60900213421" Wurth_60900213421 -42.164,108.585 r90 top
M8 "60900213421" Wurth_60900213421 -44.704,108.585 r90 top
M9 "60900213421" Wurth_60900213421 -53.085,118.792 r90 top
M10 "60900213421" Wurth_60900213421 -55.674,118.745 r90 top
M11 "60900213421" Wurth_60900213421 -49.53,45.085 r90 top
M12 "60900213421" Wurth_60900213421 -52.06,45.085 r90 top
MH1 "MTG_NoPads" NPTH125mil -55.88,137.16 r0 top
MH2 "MTG_NoPads" NPTH125mil -2.54,137.16 r0 top
MH3 "MTG_NoPads" NPTH125mil -55.88,2.54 r0 top
MH4 "MTG_NoPads" NPTH125mil -2.54,2.54 r0 top locked
R1 "RC0402JR-070RL" 0402 -28.902,123.745 r0 top value=0
R2 "RC0402JR-070RL" 0402 -28.902,122.412 r0 top value=0
R3 "CRCW0402680RJNED" 0402 -39.884,102.631 r180 top value=680
R4 "CRCW04022K20JNED" 0402 -8.257,106.094 r180 top value=2.2k
R5 "CRCW04020000Z0ED" 0402 -8.285,107.315 r0 top value=0
R6 "CRCW06032K20JNEA" 0603 -13.99,106.97 r270 bottom value=2.2k
R7 "RC0603JR-073KL" 0603 -52.192,126.704 r180 top value=3.0k
R8 "RC0402JR-070RL" 0402 -11.812,102.12 r0 top value=0
R9 "RC0402JR-070RL" 0402 -11.812,99.51 r0 top value=0
R10 "CRCW04022K20JNED" 0402 -25.942,58.19 r315 bottom value=2.2k
R11 "CRCW04022K20JNED" 0402 -13.418,89.632 r180 bottom value=2.2k
R12 "RC0402JR-070RL" 0402 -44.765,15.649 r0 top value=0
R13 "RC0402JR-070RL" 0402 -44.765,79.061 r0 top value=0
R14 "RC0402JR-070RL" 0402 -44.765,93.599 r0 top value=0
R15 "RC0402JR-070RL" 0402 -44.765,91.567 r0 top value=0
R16 "RC0402JR-070RL" 0402 -44.765,26.416 r0 top value=0
R17 "RC0402JR-070RL" 0402 -44.765,28.479 r0 top value=0
R18 "RC0402JR-070RL" 0402 -44.765,97.917 r0 top value=0
R19 "RC0402JR-070RL" 0402 -44.765,80.814 r0 top value=0
R20 "RC0402JR-070RL" 0402 -44.765,24.257 r0 top value=0
R21 "RC0402JR-070RL" 0402 -44.765,30.638 r0 top value=0
R22 "RC0402JR-070RL" 0402 -44.765,85.09 r0 top value=0
R23 "RC0402JR-070RL" 0402 -44.765,17.811 r0 top value=0
R24 "RC0402JR-070RL" 0402 -44.765,89.662 r0 top value=0
R25 "RC0402JR-070RL" 0402 -44.798,95.758 r0 top value=0
R26 "RC0402JR-070RL" 0402 -44.765,87.411 r0 top value=0
R27 "RC0402JR-070RL" 0402 -44.765,22.129 r0 top value=0
R28 "CRCW0402680RJNED" 0402 -20.781,99.271 r270 top value=680
R29 "CRCW0402680RJNED" 0402 -15.367,99.271 r270 top value=680
R30 "CRCW040210M0JNED" 0402 -20.522,95.67 r90 top value=10Meg
R31 "CRCW040210M0JNED" 0402 -15.442,95.67 r90 top value=10Meg
R32 "CRCW06030000Z0EA" 0603 -18.294,58.379 r45 top value=0
R33 "CRCW06030000Z0EA" 0603 -16.066,60.646 r45 top value=0
R34 "CRCW06030000Z0EA" 0603 -20.522,92.622 r90 top value=0
R35 "CRCW06030000Z0EA" 0603 -15.468,92.622 r90 top value=0
R36 "CRCW06030000Z0EA" 0603 -19.465,59.543 r225 top value=0
R37 "CRCW06030000Z0EA" 0603 -17.258,61.761 r225 top value=0
R38 "RC0603FR-0710KL" 0603 -25.743,45.483 r270 bottom value=10.0k
R39 "RC0603FR-0710KL" 0603 -22.067,45.483 r90 bottom value=10.0k
R41 "CRCW06030000Z0EA" 0603 -26.836,24.792 r0 top value=0
R43 "RC0603JR-073KL" 0603 -47.949,107.157 r0 top value=3.0k
R44 "RC0402JR-070RL" 0402 -28.009,62.886 r135 bottom value=0
R45 "RC0402JR-070RL" 0402 -24.856,59.368 r135 bottom value=0
R47 "CRCW06030000Z0EA" 0603 -25.478,19.653 r0 top value=0
R48 "CRCW06032K20JNEA" 0603 -22.816,15.645 r0 top value=2.2k
R49 "RC0402JR-070RL" 0402 -11.748,38.767 r0 top value=0
R50 "RC0402JR-070RL" 0402 -11.748,36.143 r0 top value=0
R52 "CRCW06030000Z0EA" 0603 -25.465,21.114 r180 top value=0
R53 "CRCW06030000Z0EA" 0603 -22.816,14.097 r0 top value=0
R57 "CRCW04023K30JNED" 0402 -8.142,111.424 r0 top value=3.3k
R58 "CRCW04021K00FKED" 0402 -8.146,116.438 r0 top value=1.00k
R59 "CRCW04021K00FKED" 0402 -8.146,115.168 r0 top value=1.00k
R60 "CRCW04021K00FKED" 0402 -8.146,113.898 r0 top value=1.00k
R61 "CRCW04021K00FKED" 0402 -8.146,112.628 r0 top value=1.00k
R62 "CRCW0402100RJNED" 0402 -6.078,136.091 r0 top value=100
R63 "RC0402FR-07470RL" 0402 -25.781,133.172 r270 top value=470
R64 "RC0402FR-07470RL" 0402 -27.94,133.172 r270 top value=470
R65 "CRCW040210K0JNED" 0402 -5.232,123.37 r270 top value=10k
R67 "CRCW040210K0JNED" 0402 -5.232,125.949 r270 top value=10k
R68 "CRCW04024K87FKED" 0402 -11.262,118.209 r90 top value=4.87k
R70 "CRCW040251R0JNED" 0402 -5.241,120.792 r90 top value=51
R72 "CRCW04021K00FKED" 0402 -20.93,6.35 r0 top value=1.00k
R73 "CRCW04021K00FKED" 0402 -23.641,6.35 r0 top value=1.00k
R74 "CRCW04021K00FKED" 0402 -26.435,6.35 r0 top value=1.00k
R75 "CRCW04021K00FKED" 0402 -36.195,6.096 r0 top value=1.00k
R76 "CRCW04021K00FKED" 0402 -38.989,6.096 r0 top value=1.00k
R77 "CRCW04021K00FKED" 0402 -41.783,6.096 r0 top value=1.00k
R79 "RC0603FR-07120RL" 0603 -16.703,5.757 r0 top value=120
R82 "CRCW06030000Z0EA" 0603 -11.113,70.203 r180 bottom value=0
R83 "CRCW06030000Z0EA" 0603 -11.124,71.755 r0 bottom value=0
R84 "RC0402JR-070RL" 0402 -44.765,19.97 r0 top value=0
R85 "RC0402JR-070RL" 0402 -44.765,32.67 r0 top value=0
R86 "RC0402JR-070RL" 0402 -44.765,82.917 r0 top value=0
R87 "RC0402JR-070RL" 0402 -44.765,34.671 r0 top value=0
R88 "RC0603JR-075K1L" 0603 -48.25,125.6 r90 top value=5.1k
R89 "RC0603JR-075K1L" 0603 -46.702,125.6 r90 top value=5.1k
R100 "CRCW04021M00FKED" 0402 -48.987,130.175 r0 top value=1.00Meg
R101 "CRCW040252K3FKED" 0402 -49.403,111.633 r0 top value=52.3k
R102 "CRCW040230K0FKED" 0402 -49.403,114.122 r180 top value=30.0k
R103 "RC0402JR-070RL" 0402 -43.905,123.678 r0 top value=0
R104 "RC0402JR-070RL" 0402 -43.905,122.501 r0 top value=0
R105 "CRCW0402680RJNED" 0402 -43.272,115.189 r180 top value=680
S1 "1188E-1K2-V-TR" SW_1188E -3.048,108.585 r180 top
S2 "CAS-D20TA" SW_CAS-D20TA -25.811,90.491 r0 top
S3 "CAS-D20TA" SW_CAS-D20TA -24.123,44.652 r180 top
S4 "CAS-220TA" SW_CAS-220TA -16.781,19.889 r180 top locked
S5 "CAS-D20TA" SW_CAS-D20TA -31.237,39.383 r180 top
TP1 "TESTPOINT" TP_50MIL-25MILHOLE -22.27,72.638 r0 top
TP2 "TESTPOINT" TP_50MIL-25MILHOLE -36.876,54.597 r0 top
TP3 "TESTPOINT" TP_50MIL-25MILHOLE -42.337,62.162 r0 top
TP4 "TESTPOINT" TP_50MIL-25MILHOLE -33.44,24.177 r0 top
TP5 "TESTPOINT" TP_50MIL-25MILHOLE -33.096,6.086 r0 top
TP6 "TESTPOINT" TP_50MIL-25MILHOLE -6.358,43.831 r0 top
TP7 "TESTPOINT" TP_50MIL-25MILHOLE -14.783,15.367 r90 top
TP8 "TESTPOINT" TP_50MIL-25MILHOLE -18.826,15.338 r90 top
U1 "F280039CPZS" PZ0100A-MFG -29.21,65.292 r315 top locked
U2 "MSP432E401YTPDT" PDT0128A -15.235,128.27 r0 top locked
U3 "ISOUSB111DW" DW0016B-MFG -36.514,125.603 r0 top
U4 "TPD4E004DRYR" DRY0006A -33.653,113.365 r270 top
U5 "TPD4E004DRYR" DRY0006A -25.169,112.806 r0 top
U6 "TS5A23157DGSR" DGS0010A_N -33.678,98.509 r0 top
U7 "SN74LVC2G07DBVR" DBV0006A_N -17.982,94.908 r90 top
U8 "TS5A23157DGSR" DGS0010A_N -46.064,56.524 r270 top
U9 "TS5A23157DGSR" DGS0010A_N -25.397,97.885 r90 top
U10 "TPS3702CX33DDCR" DDC0006A_N -11.162,106.97 r180 bottom
U11 "SN74LV4053APWR" PW0016A-MFG -30.512,28.39 r180 top
U13 "SN74LVC8T245PW" PW0024A_N -29.293,14.638 r270 top locked
U14 "SN74LV4053APWR" PW0016A-MFG -20.165,28.39 r180 top
U15 "TCAN332DR" D0008A_N -16.637,10.787 r270 top
U16 "TPD4E05U06DQAR" DQA0010A -45.597,129.852 r90 top
U18 "F2800137SPM" PM0064A-IPC_C -29.21,65.278 r315 top locked
U101 "TPS7A3701DRVR" DRV0006A -52.959,112.21 r180 top
USB101 "MUP-U22001" FP-MUP-U22001_CONN_USB_8MM94_8MM0-MFG -46.22,136.17 r180 top locked
Y1 "NX3225GA-16.000M-STD-CRG-1" NDK_NX3225GA -3.043,131.064 r180 top
Y2 "ECS-200-8-30B-CKM" FP-ECS-200-8-30B-CKM_SMD4-MFG -15.262,57.719 r45 top
ZZ1 "These assemblies are ESD sensitive, ESD precautions shall be observed." AssemblyNote -52.978,147.676 r0 top
ZZ2 "These assemblies must be clean and free from flux and all contaminants. Use of no clean flux is not acceptable." AssemblyNote -52.807,151.384 r0 top
ZZ3 "These assemblies must comply with workmanship standards IPC-A-610 Class 2, unless otherwise specified." AssemblyNote -52.875,155.194 r0 top

## Footprints (in the part's own frame and the unit in brackets; to place one, negate y for a bottom-side part, rotate by r counter-clockwise, add the part's x,y. Pads: shape width x height; smd on the part's side, far side on the other; paste and mask are expansions set on the pad)
0402 [mm] "0402 from SM-752 data"
  rect 0.8x0.6 smd: 1(-0.6,0) 2(0.6,0)
  silkscreen extent -1.22,-0.52 1.22,0.52, body extent -0.55,-0.3 0.55,0.3, height 0.6
0603 [mm] "0603 from SM-752 data"
  rect 1x0.95 smd: 1(-0.8,0) 2(0.8,0)
  silkscreen extent -1.52,-0.69 1.52,0.69, body extent -0.87,-0.47 0.87,0.47, height 1
0805_HV [mil] "0805 with 30mil clearance between pads"
  rect 50x63 smd: 1(-40,0) 2(40,0)
  silkscreen extent -74,-40 74,40, body extent -43,-29 43,29, height 57
1812 [mm]
  rect 1.6x3.4 smd: 1(-2,0) 2(2,0)
  silkscreen extent -0.8,-1.6 0.8,1.6, body extent -2.4,-1.7 2.4,1.7, height 1.35
AssemblyNote [mm] "Assembly Note"
BoosterPack_40pin_J1J3 [mm] "Receptacle, 2.54mm, 10x2, TH"
  rrect6% 1.55x1.55 hole 1.02: 1(1.27,11.43)
  round 1.55 hole 1.02: 2(1.27,8.89) 3(1.27,6.35) 4(1.27,3.81) 5(1.27,1.27) 6(1.27,-1.27) 7(1.27,-3.81) 8(1.27,-6.35) 9(1.27,-8.89) 10(1.27,-11.43) 21(-1.27,11.43) 22(-1.27,8.89) 23(-1.27,6.35) 24(-1.27,3.81) 25(-1.27,1.27) 26(-1.27,-1.27) 27(-1.27,-3.81) 28(-1.27,-6.35) 29(-1.27,-8.89) 30(-1.27,-11.43)
  silkscreen extent -7.62,-12.95 7.62,12.95, body extent 0,0 0,0
BoosterPack_40pin_J2J4 [mm] "Receptacle, 2.54mm, 10x2, TH"
  round 1.55 hole 1.02: 11(-1.27,-11.43) 12(-1.27,-8.89) 13(-1.27,-6.35) 14(-1.27,-3.81) 15(-1.27,-1.27) 16(-1.27,1.27) 17(-1.27,3.81) 18(-1.27,6.35) 19(-1.27,8.89) 20(-1.27,11.43) 31(1.27,-11.43) 32(1.27,-8.89) 33(1.27,-6.35) 34(1.27,-3.81) 35(1.27,-1.27) 36(1.27,1.27) 37(1.27,3.81) 38(1.27,6.35) 39(1.27,8.89) 40(1.27,11.43)
  silkscreen extent -7.62,-12.95 2.48,12.95, body extent 0,0 0,0
BoosterPack_40pin_J5J7 [mm] "Receptacle, 2.54mm, 10x2, TH"
  round 1.55 hole 1.02: 41(1.27,11.43) 42(1.27,8.89) 43(1.27,6.35) 44(1.27,3.81) 45(1.27,1.27) 46(1.27,-1.27) 47(1.27,-3.81) 48(1.27,-6.35) 49(1.27,-8.89) 50(1.27,-11.43) 61(-1.27,11.43) 62(-1.27,8.89) 63(-1.27,6.35) 64(-1.27,3.81) 65(-1.27,1.27) 66(-1.27,-1.27) 67(-1.27,-3.81) 68(-1.27,-6.35) 69(-1.27,-8.89) 70(-1.27,-11.43)
  silkscreen extent -7.62,-12.95 7.62,12.95, body extent 0,0 0,0
BoosterPack_40pin_J6J8 [mm] "Receptacle, 2.54mm, 10x2, TH"
  round 1.55 hole 1.02: 51(-1.27,-11.43) 52(-1.27,-8.89) 53(-1.27,-6.35) 54(-1.27,-3.81) 55(-1.27,-1.27) 56(-1.27,1.27) 57(-1.27,3.81) 58(-1.27,6.35) 59(-1.27,8.89) 60(-1.27,11.43) 71(1.27,-11.43) 72(1.27,-8.89) 73(1.27,-6.35) 74(1.27,-3.81) 75(1.27,-1.27) 76(1.27,1.27) 77(1.27,3.81) 78(1.27,6.35) 79(1.27,8.89) 80(1.27,11.43)
  silkscreen extent -7.62,-12.95 2.48,12.95, body extent 0,0 0,0
CE_Mark_5mm [mm] "Minimum text height for CE Mark"
  silkscreen extent -3.5,-2.5 3.5,2.5
D0008A_N [mm] "SOIC, 8-Leads, Body 4.9x3.9mm, Pitch 1.27mm, IPC Medium Density"
  oval 1.45x0.6 smd: 1(-2.725,1.905) 2(-2.725,0.635) 3(-2.725,-0.635) 4(-2.725,-1.905) 5(2.725,-1.905) 6(2.725,-0.635) 7(2.725,0.635) 8(2.725,1.905)
  silkscreen extent -3.3,-2.5 0.9,2.5, body extent -3,-2.45 3,2.45, height 1.63
DBV0006A_N [mm] "SOT23, 6-Leads, Body 2.9x1.6mm, Pitch 0.95mm, Lead Span 2.8mm, IPC Medium Density"
  rrect17% 1x0.6 smd: 1(-1.375,0.95) 2(-1.375,0) 3(-1.375,-0.95) 4(1.375,-0.95) 5(1.375,0) 6(1.375,0.95)
  silkscreen extent -1.67,-1.55 0.5,1.55, body extent -1.42,-1.46 1.42,1.46, height 1.12
DDC0006A_N [mm]
  rrect17% 1x0.6 smd: 1(-1.375,0.95) 2(-1.375,0) 3(-1.375,-0.95) 4(1.375,-0.95) 5(1.375,0) 6(1.375,0.95)
  silkscreen extent -1.75,-1.52 0.7,1.53, body extent -1.43,-1.48 1.43,1.49, height 0.92
DGS0010A_N [mm] "TSSOP, 10-Leads, Body 3x3mm, Pitch 0.5mm, IPC Medium Density"
  oval 1.35x0.3 smd: 1(-2.225,1) 2(-2.225,0.5) 3(-2.225,0) 4(-2.225,-0.5) 5(-2.225,-1) 6(2.225,-1) 7(2.225,-0.5) 8(2.225,0) 9(2.225,0.5) 10(2.225,1)
  silkscreen extent -2.75,-1.55 0.9,1.55, body extent -2.45,-1.5 2.45,1.5, height 0.96
DQA0010A [mm] "SON, 10-Leads, Body 1x2.5mm, Pitch 0.5mm, TI Recommended"
  rrect50% 0.565x0.2 smd: 1(-0.417,1) 2(-0.418,0.5) 4(-0.418,-0.5) 5(-0.418,-1) 6(0.417,-1) 7(0.417,-0.5) 9(0.417,0.5) 10(0.417,1)
  rrect25% 0.565x0.4 smd: 3(-0.418,0) 8(0.417,0)
  rrect28% 0.565x0.36 on Top Paste: 3(-0.418,0) 8(0.417,0)
  silkscreen extent -0.67,-1.45 0.55,1.45, body extent -0.55,-1.3 0.55,1.3, height 0.56
DRV0006A [mm] "SON, 6-Leads, Body 2x2mm, Pitch 0.65mm, Thermal Pad 1.6x1mm, TI Recommended"
  rrect33% 0.45x0.3 smd: 1(-0.975,0.65) 2(-0.975,0) 3(-0.975,-0.65) 4(0.975,-0.65) 5(0.975,0) 6(0.975,0.65)
  rrect14% 1x0.7 on Top Paste: 7(0,0.45) 7(0,-0.45)
  rrect10% 1x1.6 smd: 7(0,0)
  silkscreen extent -1.05,-1.2 1.05,1.2, body extent -1.05,-1.05 1.05,1.05, height 0.81
DRY0006A [mm] "USON-6"
  rrect67% 0.45x0.3 smd: 1(-0.275,0.5)
  rrect67% 0.4x0.3 smd: 2(-0.3,0) 3(-0.3,-0.5) 4(0.3,-0.5) 5(0.3,0) 6(0.3,0.5)
  body extent -0.5,-0.72 0.5,0.73, height 0.58
DW0016B-MFG [mm]
  rrect17% 1.65x0.6 smd: 1(-4.875,4.445) 2(-4.875,3.175) 3(-4.875,1.905) 4(-4.875,0.635) 5(-4.875,-0.635) 6(-4.875,-1.905) 7(-4.875,-3.175) 8(-4.875,-4.445) 9(4.875,-4.445) 10(4.875,-3.175) 11(4.875,-1.905) 12(4.875,-0.635) 13(4.875,0.635) 14(4.875,1.905) 15(4.875,3.175) 16(4.875,4.445)
  silkscreen extent -6.37,-5.25 3.5,5.25, body extent -5.8,-5.5 5.8,5.5, height 0.25
FCC_disclaimer [mm]
Fiducial10-20 [mm]
  round 1 smd mask+0.5: 1(0,0)
  Top Signal keep-out circle w1.178: c0,0 r0.5
FP-61300421121_HDR4-MFG#1 [mm]
  rrect6% 1.7x1.7 hole 1.1: 1(-1.27,1.27)
  round 1.7 hole 1.1: 2(-1.27,-1.27) 3(1.27,1.27) 4(1.27,-1.27)
  silkscreen extent -2.69,-2.62 2.69,3.22, body extent -2.54,-2.54 2.54,2.54, height 5.54
FP-61300421121_HDR4-MFG#2 [mm]
  rrect6% 1.7x1.7 hole 1.1: 1(-1.27,-1.27)
  round 1.7 hole 1.1: 2(-1.27,1.27) 3(1.27,-1.27) 4(1.27,1.27)
  silkscreen extent -2.69,-3.22 2.69,2.62, body extent -2.79,-2.72 2.79,2.72, height 0.25
FP-61301221121_HDR12-MFG [mm]
  rrect6% 1.7x1.7 hole 1.1: 1(-6.35,-1.27)
  round 1.7 hole 1.1: 2(-6.35,1.27) 3(-3.81,-1.27) 4(-3.81,1.27) 5(-1.27,-1.27) 6(-1.27,1.27) 7(1.27,-1.27) 8(1.27,1.27) 9(3.81,-1.27) 10(3.81,1.27) 11(6.35,-1.27) 12(6.35,1.27)
  silkscreen extent -7.77,-3.22 7.77,2.62, body extent -7.87,-2.72 7.87,2.72, height 0.25
FP-885012205018_0402-MFG [mm]
  rrect20% 0.5x0.5 smd paste+0 mask+0: 1(-0.5,0) 2(0.5,0)
  silkscreen extent -0.5,-0.63 0.5,0.63, body extent -0.85,-0.38 0.85,0.38, height 0.25
FP-885012205050_0402-MFG [mm]
  rrect20% 0.5x0.5 smd paste+0 mask+0: 1(-0.5,0) 2(0.5,0)
  silkscreen extent -0.53,-0.63 0.53,0.63, body extent -0.85,-0.38 0.85,0.38, height 0.25
FP-885012205064_0402-MFG [mm]
  rrect20% 0.5x0.5 smd paste+0 mask+0: 1(-0.5,0) 2(0.5,0)
  silkscreen extent -0.53,-0.63 0.53,0.63, body extent -0.85,-0.38 0.85,0.38, height 0.25
FP-CC0603KRX5R6BB106_0603-MFG [mm]
  rrect13% 0.8x0.9 smd paste+0 mask+0: 1(-0.75,0) 2(0.75,0)
  silkscreen extent -0.85,-0.88 0.85,0.88, body extent -0.8,-0.4 0.8,0.4, height 1
FP-ECS-200-8-30B-CKM_SMD4-MFG [mm]
  rrect8% 1.6x1.25 smd paste+0 mask+0: 1(-1.85,-1.1) 2(1.85,-1.1) 3(1.85,1.1) 4(-1.85,1.1)
  silkscreen extent -3.27,-1.7 2.6,1.7, body extent -2.75,-1.82 2.75,1.82, height 0.25
FP-FTSH-107-01-F-DV-K_HDR14-MFG [mm]
  rrect14% 0.74x2.79 smd: 1(-3.81,-2.035) 2(-3.81,2.035) 3(-2.54,-2.035) 4(-2.54,2.035) 5(-1.27,-2.035) 6(-1.27,2.035) 7(0,-2.035) 8(0,2.035) 9(1.27,-2.035) 10(1.27,2.035) 11(2.54,-2.035) 12(2.54,2.035) 13(3.81,-2.035) 14(3.81,2.035)
  silkscreen extent -4.51,-4.11 4.51,0.27, body extent -4.61,-3.53 4.61,3.53, height 0.25
FP-MUP-U22001_CONN_USB_8MM94_8MM0-MFG [mm]
  rrect100% 0.6x1.9 hole 1.9 slot 0.6 at 0 deg: 1(-4.32,3.35) 2(4.32,3.35)
  round 1.207 smd: 1(-4.25,2.92) 2(4.25,2.92)
  round 1.207 smd far side: 1(-4.25,2.92) 2(4.25,2.92)
  rrect100% 1.25x0.7 hole 0.7 slot 1.25 at 0 deg: 1(-3.995,2.75) 2(3.995,2.75)
  rrect100% 0.7x1.5 hole 1.5 slot 0.7 at 0 deg: 3(-5.85,-1.95) 4(5.85,-1.95)
  round 1.17 smd far side: 3(-5.85,-1.625) 4(5.85,-1.625)
  round 1.17 smd: 3(-5.85,-1.625) 4(5.85,-1.625)
  rrect37% 0.27x0.9 smd: A1(-2.625,4.05) A2(-2.125,4.05) A3(-1.625,4.05) A4(-1.125,4.05) A5(-0.625,4.05) A6(-0.125,4.05) A7(0.375,4.05) A8(0.875,4.05) A9(1.375,4.05) A10(1.875,4.05) A11(2.375,4.05) A12(2.875,4.05)
  rrect37% 0.27x0.8 smd: B1(2.625,2.45) B2(2.125,2.45) B3(1.625,2.45) B4(1.125,2.45) B5(0.625,2.45) B6(0.125,2.45) B7(-0.375,2.45) B8(-0.875,2.45) B9(-1.375,2.45) B10(-1.875,2.45) B11(-2.375,2.45) B12(-2.875,2.45)
  Top Signal region: 3.72,3.35 3.72,4.05 3.72,4.169 3.811,4.39 3.98,4.559 4.201,4.65 4.32,4.65 4.439,4.65 4.66,4.559 4.829,4.39 4.92,4.169 4.92,4.05 4.92,4.05 4.92,2.85 4.92,2.731 4.829,2.51 4.66,2.341 4.439,2.25 4.32,2.25 4.32,2.25 3.82,2.25 3.711,2.25 3.508,2.334 3.354,2.488 3.27,2.691 3.27,2.8 3.268,2.898 3.332,3.082 3.456,3.233 3.624,3.332 3.72,3.35 3.72,3.35
  Top Signal region: -3.72,3.35 -3.72,4.05 -3.72,4.169 -3.811,4.39 -3.98,4.559 -4.201,4.65 -4.32,4.65 -4.439,4.65 -4.66,4.559 -4.829,4.39 -4.92,4.169 -4.92,4.05 -4.92,4.05 -4.92,2.85 -4.92,2.731 -4.829,2.51 -4.66,2.341 -4.439,2.25 -4.32,2.25 -4.32,2.25 -3.82,2.25 -3.711,2.25 -3.508,2.334 -3.354,2.488 -3.27,2.691 -3.27,2.8 -3.268,2.898 -3.332,3.082 -3.456,3.233 -3.624,3.332 -3.72,3.35
  Top Signal region: 6.5,-2.349 6.5,-2.472 6.411,-2.701 6.244,-2.882 6.023,-2.99 5.9,-2.999 5.833,-3.004 5.699,-2.987 5.572,-2.942 5.457,-2.873 5.358,-2.781 5.281,-2.672 5.227,-2.548 5.2,-2.416 5.2,-2.349 5.2,-2.349 5.2,-0.749 5.2,-0.65 5.276,-0.466 5.417,-0.325 5.601,-0.249 5.7,-0.249 5.7,-0.249 6,-0.249 6.099,-0.249 6.283,-0.325 6.424,-0.466 6.5,-0.65 6.5,-0.749 6.5,-0.749
  Top Signal region: -6.5,-2.349 -6.5,-2.472 -6.411,-2.701 -6.244,-2.882 -6.023,-2.99 -5.9,-2.999 -5.9,-2.999 -5.833,-3.004 -5.699,-2.987 -5.572,-2.942 -5.457,-2.873 -5.358,-2.781 -5.281,-2.672 -5.227,-2.548 -5.2,-2.416 -5.2,-2.349 -5.2,-2.349 -5.2,-0.749 -5.2,-0.65 -5.276,-0.466 -5.417,-0.325 -5.601,-0.249 -5.7,-0.249 -5.7,-0.249 -6,-0.249 -6.099,-0.249 -6.283,-0.325 -6.424,-0.466 -6.5,-0.65 -6.5,-0.749 -6.5,-0.749
  Bottom Signal region: 3.72,3.35 3.72,4.05 3.72,4.169 3.811,4.39 3.98,4.559 4.201,4.65 4.32,4.65 4.439,4.65 4.66,4.559 4.829,4.39 4.92,4.169 4.92,4.05 4.92,4.05 4.92,2.85 4.92,2.731 4.829,2.51 4.66,2.341 4.439,2.25 4.32,2.25 4.32,2.25 3.82,2.25 3.711,2.25 3.508,2.334 3.354,2.488 3.27,2.691 3.27,2.8 3.268,2.898 3.332,3.082 3.456,3.233 3.624,3.332 3.72,3.35
  Bottom Signal region: -3.72,3.35 -3.72,4.05 -3.72,4.169 -3.811,4.39 -3.98,4.559 -4.201,4.65 -4.32,4.65 -4.439,4.65 -4.66,4.559 -4.829,4.39 -4.92,4.169 -4.92,4.05 -4.92,4.05 -4.92,2.85 -4.92,2.731 -4.829,2.51 -4.66,2.341 -4.439,2.25 -4.32,2.25 -4.32,2.25 -3.82,2.25 -3.711,2.25 -3.508,2.334 -3.354,2.488 -3.27,2.691 -3.27,2.8 -3.268,2.898 -3.332,3.082 -3.456,3.233 -3.624,3.332 -3.72,3.35
  Bottom Signal region: 6.5,-2.349 6.5,-2.472 6.411,-2.701 6.244,-2.882 6.023,-2.99 5.9,-2.999 5.833,-3.004 5.699,-2.987 5.572,-2.942 5.457,-2.873 5.358,-2.781 5.281,-2.672 5.227,-2.548 5.2,-2.416 5.2,-2.349 5.2,-2.349 5.2,-0.749 5.2,-0.65 5.276,-0.466 5.417,-0.325 5.601,-0.249 5.7,-0.249 5.7,-0.249 6,-0.249 6.099,-0.249 6.283,-0.325 6.424,-0.466 6.5,-0.65 6.5,-0.749 6.5,-0.749
  Bottom Signal region: -6.5,-2.349 -6.5,-2.472 -6.411,-2.701 -6.244,-2.882 -6.023,-2.99 -5.9,-2.999 -5.833,-3.004 -5.699,-2.987 -5.572,-2.942 -5.457,-2.873 -5.358,-2.781 -5.281,-2.672 -5.227,-2.548 -5.2,-2.416 -5.2,-2.349 -5.2,-2.349 -5.2,-0.749 -5.2,-0.65 -5.276,-0.466 -5.417,-0.325 -5.601,-0.249 -5.7,-0.249 -5.7,-0.249 -6,-0.249 -6.099,-0.249 -6.283,-0.325 -6.424,-0.466 -6.5,-0.65 -6.5,-0.749 -6.5,-0.749
  Keep-Out Layer lines w0.2: 4.7,-3.5 4.7,0.75 ccw(c4.7,1.25) 5.2,1.25 ccw(c4.7,1.25) 4.7,1.75 -4.7,1.75 ccw(c-4.7,1.25) -5.2,1.25 ccw(c-4.7,1.25) -4.7,0.75 -4.7,-3.5
  silkscreen extent -6,0.13 6,5.17, body extent -6.6,-4.23 6.6,4.75, height 0.25
LED_LTST-C171 [mm] "LITE-ON"
  rect 1.2x1.2 smd: 1(-1.05,0) 2(1.05,0)
  silkscreen extent -1.6,-1 2.2,1, body extent -1.05,-0.67 1.05,0.67, height 0.8
LTST-C170TBKT_Blue [mm] "LITE-ON"
  rect 1.2x1.2 smd: 1(-1.05,0) 2(1.05,0)
  silkscreen extent -1.6,-1 2.2,1, body extent -1.05,-0.67 1.05,0.67, height 1.2
NDK_NX3225GA [mm] "NDK"
  rect 1.2x1.4 smd: 1(-0.8,1.1) 2(-0.8,-1.1) 3(0.8,-1.1) 4(0.8,1.1)
  silkscreen extent -1.9,-0.1 1.4,2, body extent -1.3,-1.65 1.3,1.65, height 0.9
NPTH125mil [mil]
  round 120 hole 125 unplated: 1(0,0)
PDT0128A [mm] "Thin QFP, 128-Leads, Body 14x14mm, Pitch 0.4mm"
  oval 1.4x0.2 smd: 1(-7.7,6.2) 2(-7.7,5.8) 3(-7.7,5.4) 4(-7.7,5) 5(-7.7,4.6) 6(-7.7,4.2) 7(-7.7,3.8) 8(-7.7,3.4) 9(-7.7,3) 10(-7.7,2.6) 11(-7.7,2.2) 12(-7.7,1.8) 13(-7.7,1.4) 14(-7.7,1) 15(-7.7,0.6) 16(-7.7,0.2) 17(-7.7,-0.2) 18(-7.7,-0.6) 19(-7.7,-1) 20(-7.7,-1.4) 21(-7.7,-1.8) 22(-7.7,-2.2) 23(-7.7,-2.6) 24(-7.7,-3) 25(-7.7,-3.4) 26(-7.7,-3.8) 27(-7.7,-4.2) 28(-7.7,-4.6) 29(-7.7,-5) 30(-7.7,-5.4) 31(-7.7,-5.8) 32(-7.7,-6.2) 65(7.7,-6.2) 66(7.7,-5.8) 67(7.7,-5.4) 68(7.7,-5) 69(7.7,-4.6) 70(7.7,-4.2) 71(7.7,-3.8) 72(7.7,-3.4) 73(7.7,-3) 74(7.7,-2.6) 75(7.7,-2.2) 76(7.7,-1.8) 77(7.7,-1.4) 78(7.7,-1) 79(7.7,-0.6) 80(7.7,-0.2) 81(7.7,0.2) 82(7.7,0.6) 83(7.7,1) 84(7.7,1.4) 85(7.7,1.8) 86(7.7,2.2) 87(7.7,2.6) 88(7.7,3) 89(7.7,3.4) 90(7.7,3.8) 91(7.7,4.2) 92(7.7,4.6) 93(7.7,5) 94(7.7,5.4) 95(7.7,5.8) 96(7.7,6.2)
  oval 0.2x1.4 smd: 33(-6.2,-7.7) 34(-5.8,-7.7) 35(-5.4,-7.7) 36(-5,-7.7) 37(-4.6,-7.7) 38(-4.2,-7.7) 39(-3.8,-7.7) 40(-3.4,-7.7) 41(-3,-7.7) 42(-2.6,-7.7) 43(-2.2,-7.7) 44(-1.8,-7.7) 45(-1.4,-7.7) 46(-1,-7.7) 47(-0.6,-7.7) 48(-0.2,-7.7) 49(0.2,-7.7) 50(0.6,-7.7) 51(1,-7.7) 52(1.4,-7.7) 53(1.8,-7.7) 54(2.2,-7.7) 55(2.6,-7.7) 56(3,-7.7) 57(3.4,-7.7) 58(3.8,-7.7) 59(4.2,-7.7) 60(4.6,-7.7) 61(5,-7.7) 62(5.4,-7.7) 63(5.8,-7.7) 64(6.2,-7.7) 97(6.2,7.7) 98(5.8,7.7) 99(5.4,7.7) 100(5,7.7) 101(4.6,7.7) 102(4.2,7.7) 103(3.8,7.7) 104(3.4,7.7) 105(3,7.7) 106(2.6,7.7) 107(2.2,7.7) 108(1.8,7.7) 109(1.4,7.7) 110(1,7.7) 111(0.6,7.7) 112(0.2,7.7) 113(-0.2,7.7) 114(-0.6,7.7) 115(-1,7.7) 116(-1.4,7.7) 117(-1.8,7.7) 118(-2.2,7.7) 119(-2.6,7.7) 120(-3,7.7) 121(-3.4,7.7) 122(-3.8,7.7) 123(-4.2,7.7) 124(-4.6,7.7) 125(-5,7.7) 126(-5.4,7.7) 127(-5.8,7.7) 128(-6.2,7.7)
  silkscreen extent -7.7,-6.3 6.3,6.99, body extent -8,-8 8,8, height 1.07
PM0064A-IPC_C [mm]
  rrect47% 1.355x0.212 smd: 1(-5.575,3.75)
  rrect100% 1.355x0.212 smd: 2(-5.575,3.25) 3(-5.575,2.75) 4(-5.575,2.25) 5(-5.575,1.75) 6(-5.575,1.25) 7(-5.575,0.75) 8(-5.575,0.25) 9(-5.575,-0.25) 10(-5.575,-0.75) 11(-5.575,-1.25) 12(-5.575,-1.75) 13(-5.575,-2.25) 14(-5.575,-2.75) 15(-5.575,-3.25) 16(-5.575,-3.75) 33(5.575,-3.75) 34(5.575,-3.25) 35(5.575,-2.75) 36(5.575,-2.25) 37(5.575,-1.75) 38(5.575,-1.25) 39(5.575,-0.75) 40(5.575,-0.25) 41(5.575,0.25) 42(5.575,0.75) 43(5.575,1.25) 44(5.575,1.75) 45(5.575,2.25) 46(5.575,2.75) 47(5.575,3.25) 48(5.575,3.75)
  rrect100% 0.212x1.355 smd: 17(-3.75,-5.575) 18(-3.25,-5.575) 19(-2.75,-5.575) 20(-2.25,-5.575) 21(-1.75,-5.575) 22(-1.25,-5.575) 23(-0.75,-5.575) 24(-0.25,-5.575) 25(0.25,-5.575) 26(0.75,-5.575) 27(1.25,-5.575) 28(1.75,-5.575) 29(2.25,-5.575) 30(2.75,-5.575) 31(3.25,-5.575) 32(3.75,-5.575) 49(3.75,5.575) 50(3.25,5.575) 51(2.75,5.575) 52(2.25,5.575) 53(1.75,5.575) 54(1.25,5.575) 55(0.75,5.575) 56(0.25,5.575) 57(-0.25,5.575) 58(-0.75,5.575) 59(-1.25,5.575) 60(-1.75,5.575) 61(-2.25,5.575) 62(-2.75,5.575) 63(-3.25,5.575) 64(-3.75,5.575)
  silkscreen extent -5.7,-4.25 4.25,4.58, body extent -6.35,-6.35 6.35,6.35, height 0.25
PW0016A-MFG [mm]
  rrect22% 1.5x0.45 smd: 1(-2.9,2.275) 2(-2.9,1.625) 3(-2.9,0.975) 4(-2.9,0.325) 5(-2.9,-0.325) 6(-2.9,-0.975) 7(-2.9,-1.625) 8(-2.9,-2.275) 9(2.9,-2.275) 10(2.9,-1.625) 11(2.9,-0.975) 12(2.9,-0.325) 13(2.9,0.325) 14(2.9,0.975) 15(2.9,1.625) 16(2.9,2.275)
  silkscreen extent -4.38,-2.55 1.78,2.55, body extent -3.75,-2.8 3.75,2.8, height 0.25
PW0024A_N [mm] "TSOP, 24-Leads, Body 7.8x4.4mm, Pitch 0.65mm, IPC Medium Density"
  oval 1.4x0.45 smd: 1(-2.95,3.575) 2(-2.95,2.925) 3(-2.95,2.275) 4(-2.95,1.625) 5(-2.95,0.975) 6(-2.95,0.325) 7(-2.95,-0.325) 8(-2.95,-0.975) 9(-2.95,-1.625) 10(-2.95,-2.275) 11(-2.95,-2.925) 12(-2.95,-3.575) 13(2.95,-3.575) 14(2.95,-2.925) 15(2.95,-2.275) 16(2.95,-1.625) 17(2.95,-0.975) 18(2.95,-0.325) 19(2.95,0.325) 20(2.95,0.975) 21(2.95,1.625) 22(2.95,2.275) 23(2.95,2.925) 24(2.95,3.575)
  silkscreen extent -3.51,-3.95 1.6,4.04, body extent -3.21,-3.9 3.21,3.9, height 1
PZ0100A-MFG [mm]
  rrect33% 1.6x0.3 smd: 1(-7.6,6) 2(-7.6,5.5) 3(-7.6,5) 4(-7.6,4.5) 5(-7.6,4) 6(-7.6,3.5) 7(-7.6,3) 8(-7.6,2.5) 9(-7.6,2) 10(-7.6,1.5) 11(-7.6,1) 12(-7.6,0.5) 13(-7.6,0) 14(-7.6,-0.5) 15(-7.6,-1) 16(-7.6,-1.5) 17(-7.6,-2) 18(-7.6,-2.5) 19(-7.6,-3) 20(-7.6,-3.5) 21(-7.6,-4) 22(-7.6,-4.5) 23(-7.6,-5) 24(-7.6,-5.5) 25(-7.6,-6) 51(7.6,-6) 52(7.6,-5.5) 53(7.6,-5) 54(7.6,-4.5) 55(7.6,-4) 56(7.6,-3.5) 57(7.6,-3) 58(7.6,-2.5) 59(7.6,-2) 60(7.6,-1.5) 61(7.6,-1) 62(7.6,-0.5) 63(7.6,0) 64(7.6,0.5) 65(7.6,1) 66(7.6,1.5) 67(7.6,2) 68(7.6,2.5) 69(7.6,3) 70(7.6,3.5) 71(7.6,4) 72(7.6,4.5) 73(7.6,5) 74(7.6,5.5) 75(7.6,6)
  rrect33% 0.3x1.6 smd: 26(-6,-7.6) 27(-5.5,-7.6) 28(-5,-7.6) 29(-4.5,-7.6) 30(-4,-7.6) 31(-3.5,-7.6) 32(-3,-7.6) 33(-2.5,-7.6) 34(-2,-7.6) 35(-1.5,-7.6) 36(-1,-7.6) 37(-0.5,-7.6) 38(0,-7.6) 39(0.5,-7.6) 40(1,-7.6) 41(1.5,-7.6) 42(2,-7.6) 43(2.5,-7.6) 44(3,-7.6) 45(3.5,-7.6) 46(4,-7.6) 47(4.5,-7.6) 48(5,-7.6) 49(5.5,-7.6) 50(6,-7.6) 76(6,7.6) 77(5.5,7.6) 78(5,7.6) 79(4.5,7.6) 80(4,7.6) 81(3.5,7.6) 82(3,7.6) 83(2.5,7.6) 84(2,7.6) 85(1.5,7.6) 86(1,7.6) 87(0.5,7.6) 88(0,7.6) 89(-0.5,7.6) 90(-1,7.6) 91(-1.5,7.6) 92(-2,7.6) 93(-2.5,7.6) 94(-3,7.6) 95(-3.5,7.6) 96(-4,7.6) 97(-4.5,7.6) 98(-5,7.6) 99(-5.5,7.6) 100(-6,7.6)
  silkscreen extent -9.12,-7.1 7.1,7.1, body extent -8.5,-8.5 8.5,8.5, height 0.25
Samtec_TSM-102-01-x-DV [mm] "Header, 2.54mm, 2x2, SMT"
  rect 3.048x1.27 smd: 1(-2.475,-1.27) 2(2.475,-1.27) 3(-2.475,1.27) 4(2.475,1.27)
  silkscreen extent -1.75,-2.63 1.65,2.54, body extent -3.85,-2.54 3.85,2.54, height 9.65
SW_1188E [mm] "SMD, 4-Leads, Body 7.8x3.5mm"
  rrect10% 1x1.45 smd: 1(-1.1,3.375) 2(-1.1,-3.375)
  rrect11% 1.3x0.9 smd: 3(0.7,2.1) 4(0.7,-2.1)
  round 0 hole 0.9 unplated: ""(-0.35,1.15) ""(-0.35,-1.15)
  silkscreen extent -1.98,-2.28 0.95,2.28, body extent -2.55,-3.9 1.05,3.9, height 3.5
SW_CAS-220TA [mm] "COPAL ELECTRONICS"
  rect 1.6x1 smd: 1(-1.85,1.75) 2(-1.85,0) 3(-1.85,-1.75) 4(1.85,1.75) 5(1.85,0) 6(1.85,-1.75)
  silkscreen extent -2.11,-2.9 2,3.58, body extent -2.1,-2.85 2.1,2.85, height 2.51
SW_CAS-D20TA [mm] "SMD, 6-Leads, Body 5.4x3.9mm, Pitch 1.75mm"
  rect 1.6x1 smd: 1(-1.85,1.75) 2(-1.85,0) 3(-1.85,-1.75) 4(1.85,1.75) 5(1.85,0) 6(1.85,-1.75)
  silkscreen extent -1.95,-2.7 1.95,2.9, body extent -2.1,-2.7 2.1,2.7, height 2.5
TI_Stacked_Overlay_Medium [mm]
  silkscreen extent -14.62,-3.44 14.62,3.42
TI_Symbol_Overlay_Small [mm]
  silkscreen extent -2.3,-2.23 2.3,2.24
TP_50MIL-25MILHOLE [mm]
  round 1.27 hole 0.635: 1(0,0)
WEEE_Minimum [mm] "WEEElie bin"
  silkscreen extent -2.42,-4.38 2.52,2.65
WL-SMCW_RED_0805 [mm] "SMD, 2-Leads, Body 1.6x0.8mm"
  rect 1.1x1.2 smd: 1(-1.05,0) 2(1.05,0)
  silkscreen extent -2.4,-1.1 1.5,1.1, body extent -1,-0.62 1,0.63, height 0.7
Wurth_60900213421 [mil] "Shunt, 2.54mm, Black"
  round 1 on Mech3: 0(0,0)
  body extent -98,-48 98,48, height 338
WURTH_61300211121 [mm] "Header, 2.54mm, 2x1, TH"
  rect 1.65x1.65 hole 1.15: 1(-1.27,0)
  round 1.65 hole 1.15: 2(1.27,0)
  silkscreen extent -2.54,-1.27 2.54,1.6, body extent -2.54,-1.27 2.54,1.27, height 8.54
WURTH_61300311121 [mm] "Header, 2.54mm, 3x1, TH"
  rect 1.65x1.65 hole 1.15: 1(-2.54,0)
  round 1.65 hole 1.15: 2(0,0) 3(2.54,0)
  silkscreen extent -3.81,-1.65 3.81,1.27, body extent -3.81,-1.27 3.81,1.27, height 8.54
Wurth_61300511121 [mm] "Header, 2.54mm, 5x1, TH"
  rrect50% 1.65x1.65 hole 1.1: 1(-5.08,0)
  round 1.65 hole 1.1: 2(-2.54,0) 3(0,0) 4(2.54,0) 5(5.08,0)
  body extent -6.35,-1.27 6.35,1.27, height 8.54
WURTH_61301021121 [mm] "Header, 2.54mm, 5x2, TH"
  rrect25% 1.65x1.65 hole 1.15: 1(-5.08,-1.27)
  round 1.65 hole 1.15: 2(-5.08,1.27) 3(-2.54,-1.27) 4(-2.54,1.27) 5(0,-1.27) 6(0,1.27) 7(2.54,-1.27) 8(2.54,1.27) 9(5.08,-1.27) 10(5.08,1.27)
  silkscreen extent -6.35,-2.9 6.35,2.54, body extent -6.35,-2.54 6.35,2.54, height 8.54